# EAGLE board SparkFun_ZED-F9R_Phat_v11-Panel (EAGLE 9.6.2), part 1 of 3
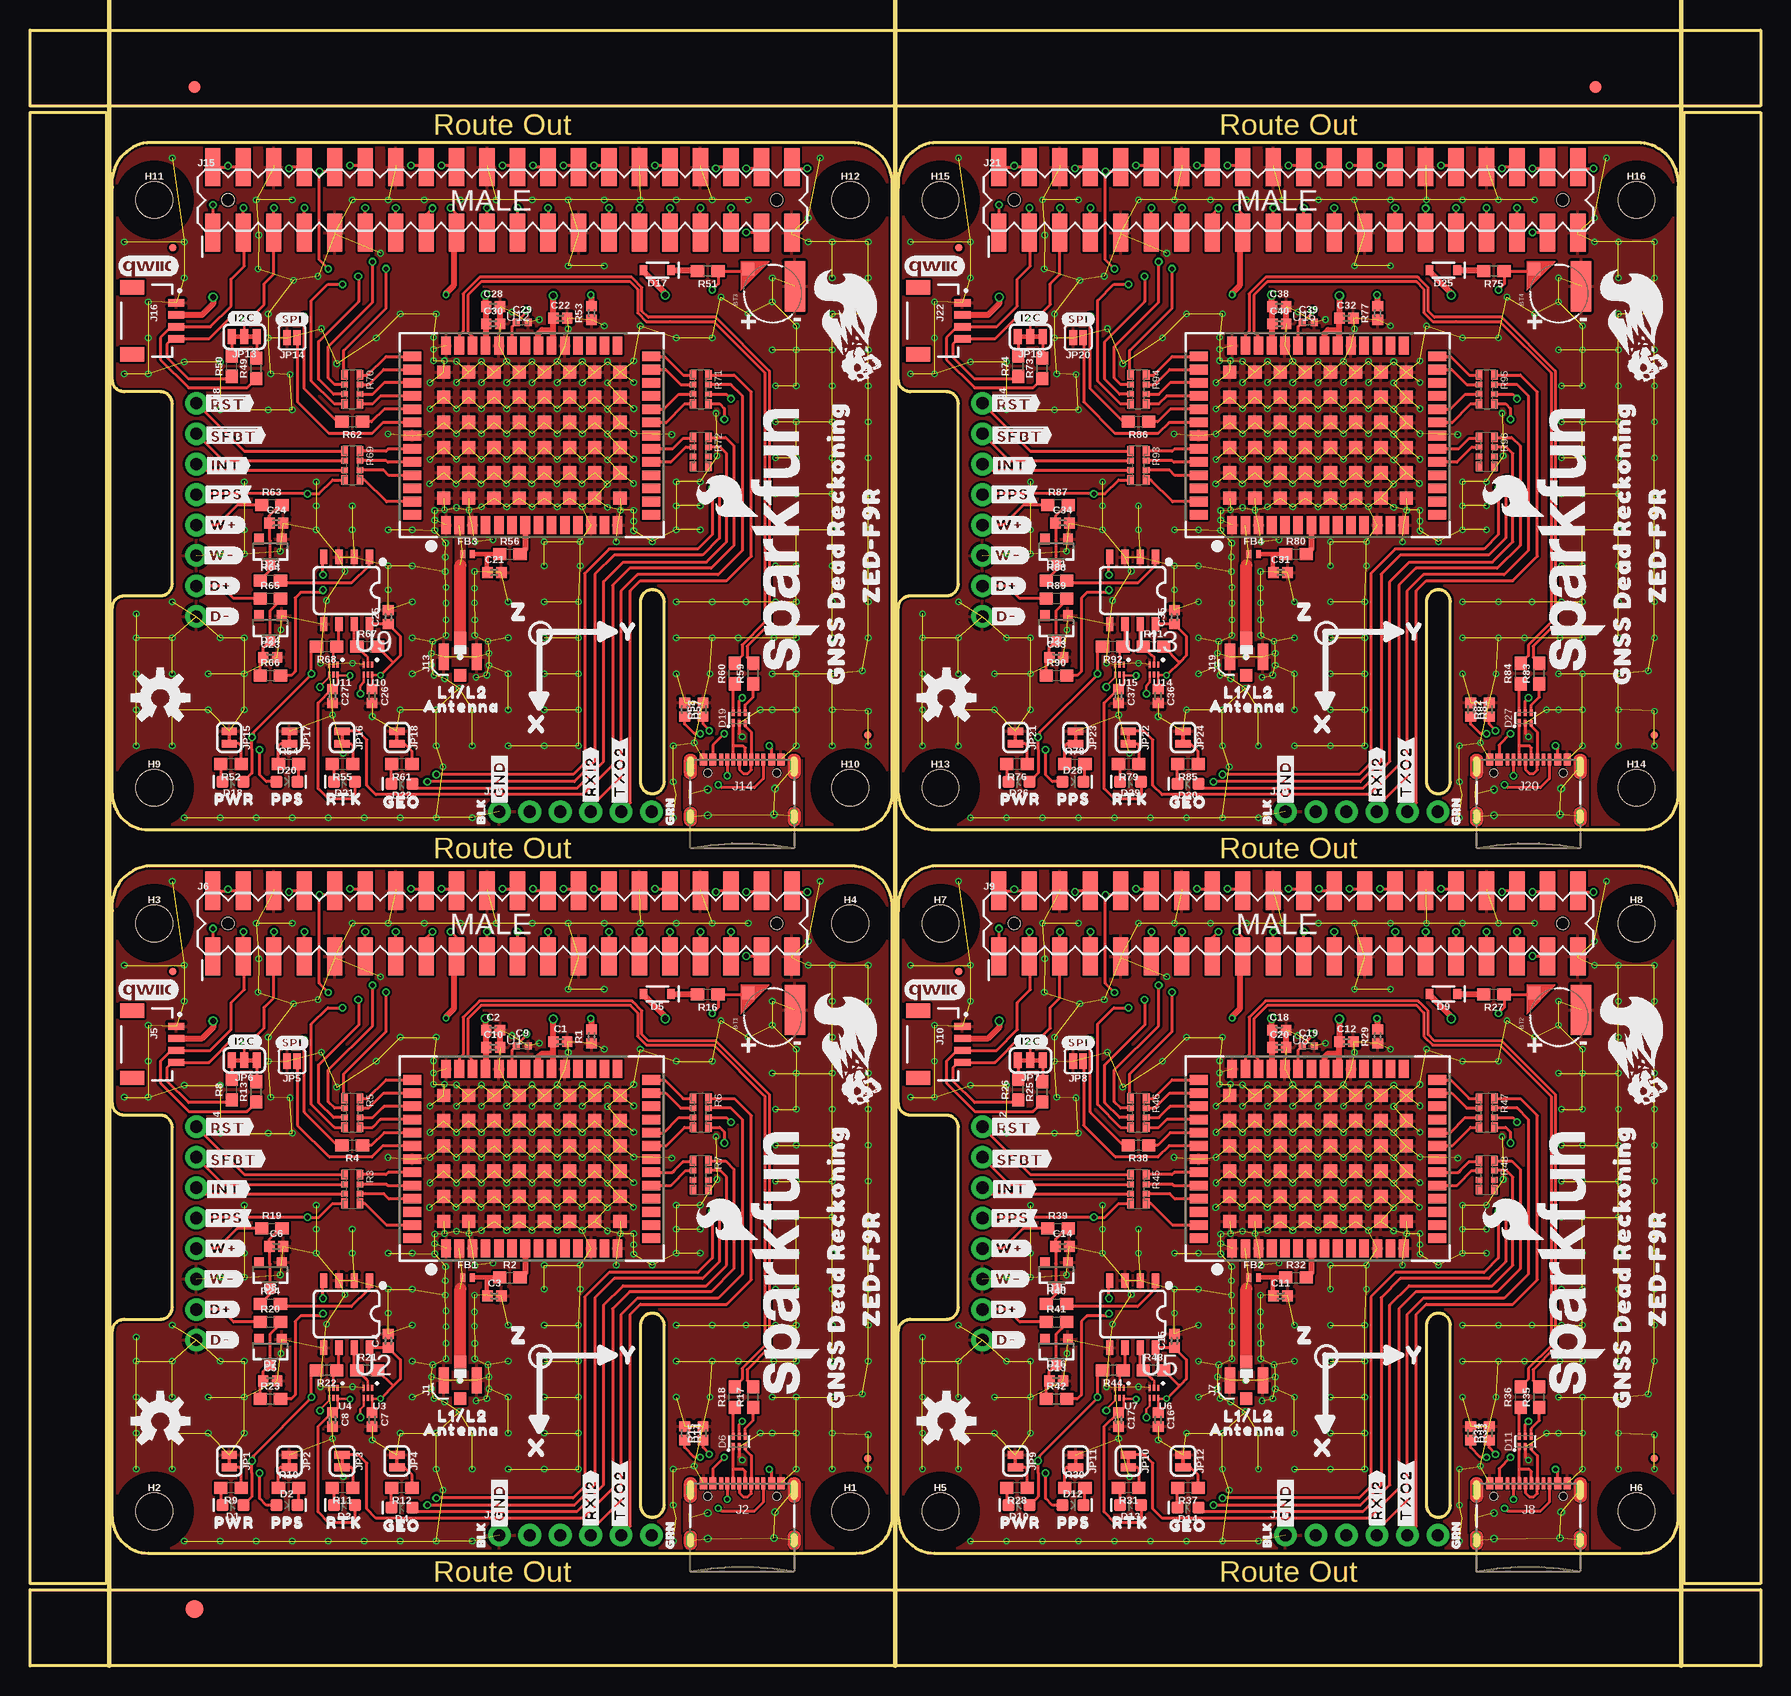
[diagram p0: board, top side]
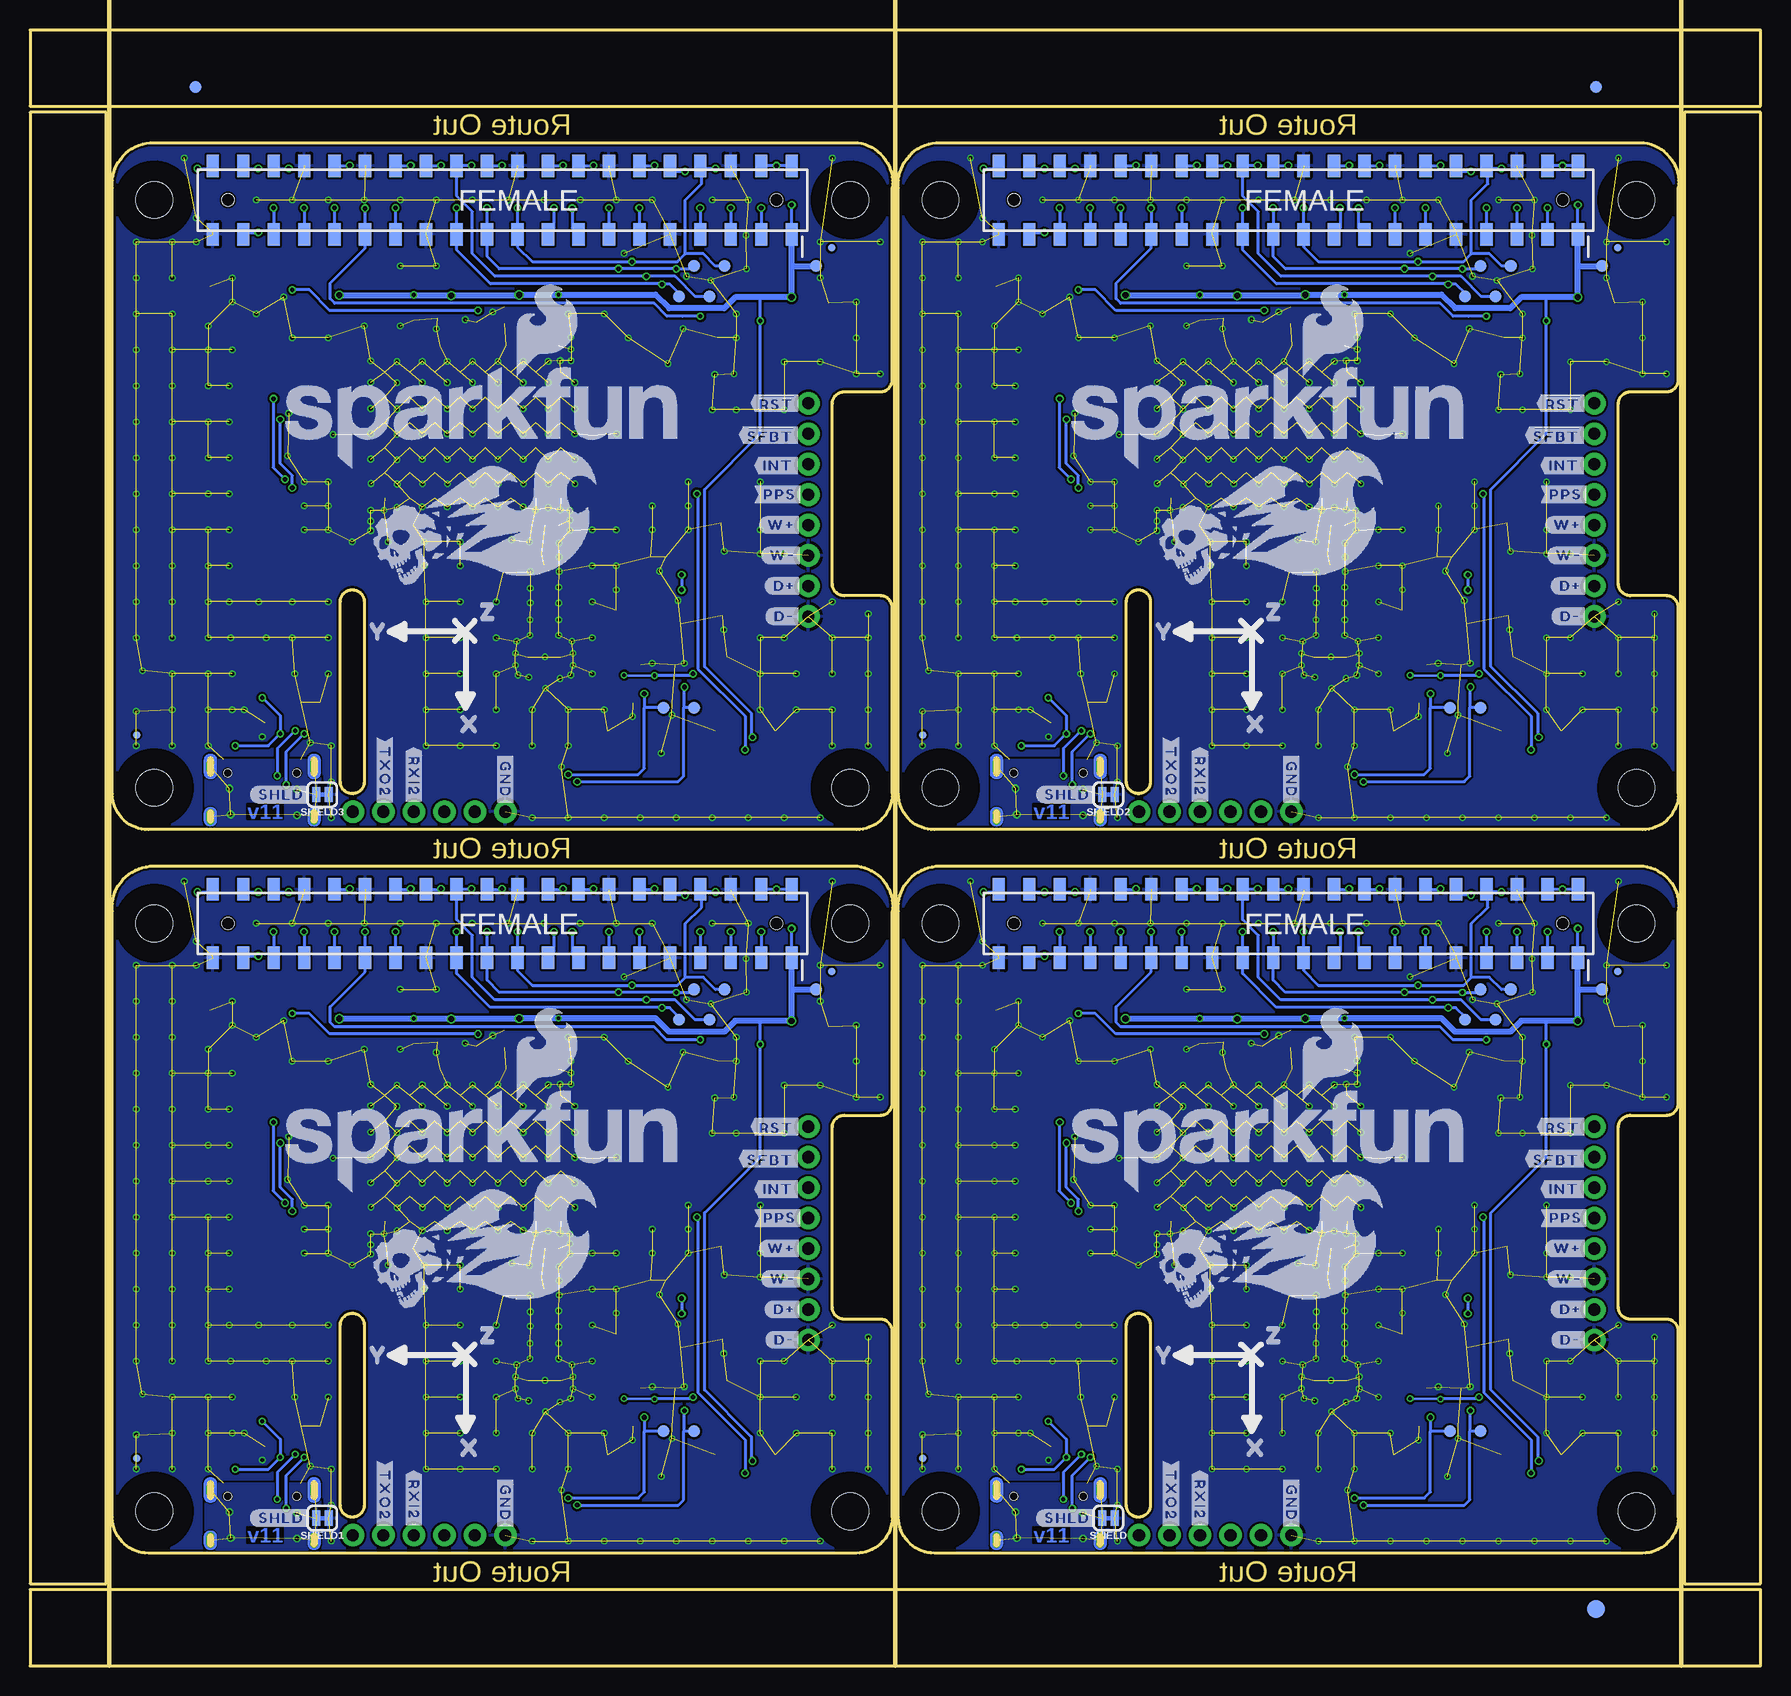
[diagram p1: board, bottom side, seen from below]

Size 144.22 x 136.37 mm. Coordinates in mm from the lower left corner, seen from the top.
Outline: 9.86,9.4 68.86,9.4 arc90 71.86,12.4 71.86,62.9 arc90 68.73,66.66 9.73,66.66 arc90 6.86,62.9 6.86,46.9 arc90 7.86,45.9 10.86,45.9 arc-90 11.86,44.9 11.86,29.9 arc-90 10.86,28.9 7.86,28.9 arc90 6.86,27.9 6.86,12.4 arc90 9.86,9.4
Outline: 51.86,12.4 arc90 52.86,13.4 52.86,28.4 arc90 51.86,29.4 arc90 50.86,28.4 50.86,13.4 arc90 51.86,12.4
Outline: 75.37,9.4 134.37,9.4 arc90 137.37,12.4 137.37,62.9 arc90 134.24,66.66 75.24,66.66 arc90 72.37,62.9 72.37,46.9 arc90 73.37,45.9 76.37,45.9 arc-90 77.37,44.9 77.37,29.9 arc-90 76.37,28.9 73.37,28.9 arc90 72.37,27.9 72.37,12.4 arc90 75.37,9.4
Outline: 117.37,12.4 arc90 118.37,13.4 118.37,28.4 arc90 117.37,29.4 arc90 116.37,28.4 116.37,13.4 arc90 117.37,12.4
Outline: 9.86,69.71 68.86,69.71 arc90 71.86,72.71 71.86,123.21 arc90 68.73,126.97 9.73,126.97 arc90 6.86,123.21 6.86,107.21 arc90 7.86,106.21 10.86,106.21 arc-90 11.86,105.21 11.86,90.21 arc-90 10.86,89.21 7.86,89.21 arc90 6.86,88.21 6.86,72.71 arc90 9.86,69.71
Outline: 51.86,72.71 arc90 52.86,73.71 52.86,88.71 arc90 51.86,89.71 arc90 50.86,88.71 50.86,73.71 arc90 51.86,72.71
Outline: 75.37,69.71 134.37,69.71 arc90 137.37,72.71 137.37,123.21 arc90 134.24,126.97 75.24,126.97 arc90 72.37,123.21 72.37,107.21 arc90 73.37,106.21 76.37,106.21 arc-90 77.37,105.21 77.37,90.21 arc-90 76.37,89.21 73.37,89.21 arc90 72.37,88.21 72.37,72.71 arc90 75.37,69.71
Outline: 117.37,72.71 arc90 118.37,73.71 118.37,88.71 arc90 117.37,89.71 arc90 116.37,88.71 116.37,73.71 arc90 117.37,72.71
Outline: 0,6.35 144.22,6.35 144.22,0 0,0 0,6.35
Outline: 137.87,129.51 144.22,129.51 144.22,6.86 137.87,6.86 137.87,129.51
Outline: 0,136.37 144.22,136.37 144.22,130.02 0,130.02 0,136.37
Outline: 0,129.51 6.35,129.51 6.35,6.86 0,6.86 0,129.51
Copper layers (1*16): Top 0.035mm / dielectric 1.5mm / Bottom 0.035mm
Design rules "SparkFun_ZED-F9R_Phat_v11": minimum track width 4mil, minimum drill 6mil, track to track 4mil, track to pad 4mil, pad to pad 4mil, via to via 4mil, smd to smd 4mil, copper to edge 4mil, drill to drill 4mil, minimum pad ring 5mil, minimum via ring 5mil, stop-mask expansion 4mil, vias tented up to drill 25mil, thermal gap 10mil
Net classes: 1 Antenna: width 1 mm, clearance 0.3 mm
tRestrict: area 65.3,9.8 to 71.5,16; area 7.3,9.8 to 13.5,16; area 7.3,58.8 to 13.5,65; area 65.3,58.8 to 71.5,65; area 130.8,9.8 to 137,16; area 72.8,9.8 to 79,16; area 72.8,58.8 to 79,65; area 130.8,58.8 to 137,65; area 65.3,70.1 to 71.5,76.3; area 7.3,70.1 to 13.5,76.3; area 7.3,119.1 to 13.5,125.3; area 65.3,119.1 to 71.5,125.3; area 130.8,70.1 to 137,76.3; area 72.8,70.1 to 79,76.3; area 72.8,119.1 to 79,125.3; area 130.8,119.1 to 137,125.3
bRestrict: area 7.3,9.8 to 13.5,16; area 7.3,58.8 to 13.5,65; area 65.3,9.8 to 71.5,16; area 65.3,58.8 to 71.5,65; area 72.8,9.8 to 79,16; area 72.8,58.8 to 79,65; area 130.8,9.8 to 137,16; area 130.8,58.8 to 137,65; area 7.3,70.1 to 13.5,76.3; area 7.3,119.1 to 13.5,125.3; area 65.3,70.1 to 71.5,76.3; area 65.3,119.1 to 71.5,125.3; area 72.8,70.1 to 79,76.3; area 72.8,119.1 to 79,125.3; area 130.8,70.1 to 137,76.3; area 130.8,119.1 to 137,125.3
Milling: 3 lines

## Footprints (pad centres in the part's own frame; a part is rotated, then mirrored left to right if it is on the bottom)
MS421R_IV03E = smd 1 x 1: + 2.022,2.032 | smd 4.2 x 1.7: - 0.6,-1.85
0402 = smd 0.85 x 0.9: 1 -0.58,0; 2 0.58,0
0402-TIGHT = smd 0.6 x 0.6: 1 -0.5,0; 2 0.5,0
LED-0603 = smd 1 x 1: A -0.877,0; C 0.877,0
SOD-323 = smd 0.63 x 0.83: A 1.15,0; C -1.15,0
SOT886 = smd 0.61 x 0.25: 1 -0.405,0.5 | smd 0.56 x 0.25: 2 -0.43,0; 3 -0.43,-0.5; 4 0.43,-0.5; 5 0.43,0; 6 0.43,0.5
SOT23-3 = smd 0.8 x 0.9: 1 -0.95,-1; 2 0.95,-1; 3 0,1.1
FIDUCIAL-1X2 = smd 1 x 1: 1 0,0
FIDUCIAL-1.5X3 = smd 1.5 x 1.5: 1 0,0
0402_MURATA = smd 0.4 x 0.7: P1 -0.4,0; P2 0.4,0
FIDUCIAL-MICRO = smd 0.635 x 0.635: 1 0,0
STAND-OFF-TIGHT = hole 3.048: 0,0
U.FL = smd 2.2 x 0.85: 1 0,1.375; 2 0,-1.375 | smd 1.05 x 1: FEED 1.525,0; NC -1.525,0
USB-C-16P-2LAYER-PADS = smd 0.3 x 1: A5 -1.25,-0.34; A6 -0.25,-0.34; A7 0.25,-0.34; A8 1.25,-0.34; B5 1.75,-0.34; B6 0.75,-0.34; B7 -0.75,-0.34; B8 -1.75,-0.34 | smd 0.6 x 1: GND -3.225,-0.34; GND2 3.225,-0.34; VBUS1 -2.45,-0.34; VBUS2 2.45,-0.34 | drill 0.4 pad 0.6 long: SHLD1 -4.318,-0.915; SHLD2 4.318,-0.915; SHLD3 -4.318,-5.095; SHLD4 4.318,-5.095 | hole 0.65: -2.89,-1.445; 2.89,-1.445
1X06_NO_SILK = drill 1.016 pad 1.88: 1 0,0; 2 2.54,0; 3 5.08,0; 4 7.62,0; 5 10.16,0; 6 12.7,0
1X08_NO_SILK = drill 1.016 pad 1.88: 1 0,0; 2 2.54,0; 3 5.08,0; 4 7.62,0; 5 10.16,0; 6 12.7,0; 7 15.24,0; 8 17.78,0
JST04_1MM_RA = smd 0.6 x 1.35: 1 -1.5,0; 2 -0.5,0; 3 0.5,0; 4 1.5,0 | smd 1.2 x 2: NC1 2.8,-3.675; NC2 -2.8,-3.675
RASPBERRY_PI_HAT_40_PIN_SMD_STACKABLE_NOHOLES_NOREF = smd 1.27 x 3.175: 1 0,-1.46; 2 0,4; 3 2.54,-1.46; 4 2.54,4; 5 5.08,-1.46; 6 5.08,4; 7 7.62,-1.46; 8 7.62,4; 9 10.16,-1.46; 10 10.16,4; 11 12.7,-1.46; 12 12.7,4; 13 15.24,-1.46; 14 15.24,4; 15 17.78,-1.46; 16 17.78,4; 17 20.32,-1.46; 18 20.32,4; 19 22.86,-1.46; 20 22.86,4; 21 25.4,-1.46; 22 25.4,4; 23 27.94,-1.46; 24 27.94,4; 25 30.48,-1.46; 26 30.48,4; 27 33.02,-1.46; 28 33.02,4; 29 35.56,-1.46; 30 35.56,4; 31 38.1,-1.46; 32 38.1,4; 33 40.64,-1.46; 34 40.64,4; 35 43.18,-1.46; 36 43.18,4; 37 45.72,-1.46; 38 45.72,4; 39 48.26,-1.46; 40 48.26,4 | smd 1.02 x 1.87 bottom: 1B 0,-1.587; 2B 0,4.128; 3B 2.54,-1.587; 4B 2.54,4.128; 5B 5.08,-1.587; 6B 5.08,4.128; 7B 7.62,-1.587; 8B 7.62,4.128; 9B 10.16,-1.587; 10B 10.16,4.128; 11B 12.7,-1.587; 12B 12.7,4.128; 13B 15.24,-1.587; 14B 15.24,4.128; 15B 17.78,-1.587; 16B 17.78,4.128; 17B 20.32,-1.587; 18B 20.32,4.128; 19B 22.86,-1.587; 20B 22.86,4.128; 21B 25.4,-1.587; 22B 25.4,4.128; 23B 27.94,-1.587; 24B 27.94,4.128; 25B 30.48,-1.587; 26B 30.48,4.128; 27B 33.02,-1.587; 28B 33.02,4.128; 29B 35.56,-1.587; 30B 35.56,4.128; 31B 38.1,-1.587; 32B 38.1,4.128; 33B 40.64,-1.587; 34B 40.64,4.128; 35B 43.18,-1.587; 36B 43.18,4.128; 37B 45.72,-1.587; 38B 45.72,4.128; 39B 48.26,-1.587; 40B 48.26,4.128 | hole 1: 1.27,1.27; 46.99,1.27
SMT-JUMPER_2_NC_TRACE_SILK = smd 0.66 x 1.27: 1 -0.521,0; 2 0.521,0
SMT-JUMPER_2_NO_SILK = smd 0.635 x 1.27: 1 -0.406,0; 2 0.406,0
SMT-JUMPER_3_2-NC_TRACE_SILK = smd 0.66 x 1.27: 1 -1.041,0; 2 0,0; 3 1.041,0
0603 = smd 1.1 x 1: 1 -0.85,0; 2 0.85,0
1206_RA = smd 0.8 x 0.55: P1 -1.2,-0.62; P4 1.2,-0.62; P5 1.2,0.68; P8 -1.2,0.68 | smd 0.5 x 0.55: P2 -0.4,-0.62; P3 0.4,-0.62; P6 0.4,0.68; P7 -0.4,0.68
PAD.03X.04 = smd 1.016 x 1.016: P$1 0,0
UBLOX_ZED_F9R = smd 1.1 x 1.1: G1 -7.312,-5.37; G2 -5.212,-5.37; G3 -3.112,-5.37; G4 -1.012,-5.37; G5 1.088,-5.37; G6 3.188,-5.37; G7 5.288,-5.37; G8 7.388,-5.37; G9 7.388,-3.27; G10 5.288,-3.27; G11 3.188,-3.27; G12 1.088,-3.27; G13 -1.012,-3.27; G14 -3.112,-3.27; G15 -5.212,-3.27; G16 -7.312,-3.27; G17 -7.312,-1.17; G18 -5.212,-1.17; G19 -3.112,-1.17; G20 -1.012,-1.17; G21 1.088,-1.17; G22 3.188,-1.17; G23 5.288,-1.17; G24 7.388,-1.17; G25 7.388,0.93; G26 5.288,0.93; G27 3.188,0.93; G28 1.088,0.93; G29 -1.012,0.93; G30 -3.112,0.93; G31 -5.212,0.93; G32 -7.312,0.93; G33 -7.312,3.03; G34 -5.212,3.03; G35 -3.112,3.03; G36 -1.012,3.03; G37 1.088,3.03; G38 3.188,3.03; G39 5.288,3.03; G40 7.388,3.03; G41 7.388,5.13; G42 5.288,5.13; G43 3.188,5.13; G44 1.088,5.13; G45 -1.012,5.13; G46 -3.112,5.13; G47 -5.212,5.13; G48 -7.312,5.13 | smd 0.8 x 1.5: P1 -7.112,-7.62; P2 -6.012,-7.62; P3 -4.912,-7.62; P4 -3.812,-7.62; P5 -2.712,-7.62; P6 -1.612,-7.62; P7 -0.512,-7.62; P8 0.588,-7.62; P9 1.688,-7.62; P10 2.788,-7.62; P11 3.888,-7.62; P12 4.988,-7.62; P13 6.088,-7.62; P14 7.188,-7.62; P28 7.188,7.33; P29 6.088,7.33; P30 4.988,7.33; P31 3.888,7.33; P32 2.788,7.33; P33 1.688,7.33; P34 0.588,7.33; P35 -0.512,7.33; P36 -1.612,7.33; P37 -2.712,7.33; P38 -3.812,7.33; P39 -4.912,7.33; P40 -6.012,7.33; P41 -7.112,7.33 | smd 1.5 x 0.8: P15 9.988,-6.77; P16 9.988,-5.67; P17 9.988,-4.57; P18 9.988,-3.47; P19 9.988,-2.37; P20 9.988,-1.27; P21 9.988,-0.17; P22 9.988,0.93; P23 9.988,2.03; P24 9.988,3.13; P25 9.988,4.23; P26 9.988,5.33; P27 9.988,6.43; P42 -9.912,6.43; P43 -9.912,5.33; P44 -9.912,4.23; P45 -9.912,3.13; P46 -9.912,2.03; P47 -9.912,0.93; P48 -9.912,-0.17; P49 -9.912,-1.27; P50 -9.912,-2.37; P51 -9.912,-3.47; P52 -9.912,-4.57; P53 -9.912,-5.67; P54 -9.912,-6.77
SO08 = smd 0.6 x 1.2: 1 -1.905,-2.8; 2 -0.635,-2.8; 3 0.635,-2.8; 4 1.905,-2.8; 5 1.905,2.8; 6 0.635,2.8; 7 -0.635,2.8; 8 -1.905,2.8
SIP6_MICROPAK2 = smd 0.19 x 0.5: P1 -0.36,-0.4; P2 -0.01,-0.4; P3 0.34,-0.4; P4 0.34,0.43; P5 -0.01,0.43; P6 -0.36,0.43

## Placement (x,y rotation side)
BT1  RELOWABLE_BATTERY_MS421R  [MS421R_IV03E]  61.89,54.08 90 top
BT2  RELOWABLE_BATTERY_MS421R  [MS421R_IV03E]  127.4,54.08 90 top
BT3  RELOWABLE_BATTERY_MS421R  [MS421R_IV03E]  61.89,114.39 90 top
BT4  RELOWABLE_BATTERY_MS421R  [MS421R_IV03E]  127.4,114.39 90 top
C1  1.0uF  [0402]  44.2,52.03 0 top
C2  1.0uF  [0402]  38.59,53 0 top
C3  47pF  [0402]  38.7,30.84 0 top
C4  0.1uF  [0402]  29.86,27.11 90 top
C5  1nF  [0402]  20.03,23.77 0 top
C6  1nF  [0402]  20.53,34.97 0 top
C7  0.1uF  [0402]  28.5,20.53 270 top
C8  0.1uF  [0402]  25.2,20.53 270 top
C9  2.2uF  [0402-TIGHT]  41.02,51.69 0 top
C10  1.0uF  [0402]  38.61,51.56 0 top
C11  47pF  [0402]  104.21,30.84 0 top
C12  1.0uF  [0402]  109.71,52.03 0 top
C13  1nF  [0402]  85.53,23.77 0 top
C14  1nF  [0402]  86.04,34.97 0 top
C15  0.1uF  [0402]  95.37,27.11 90 top
C16  0.1uF  [0402]  94.01,20.53 270 top
C17  0.1uF  [0402]  90.71,20.53 270 top
C18  1.0uF  [0402]  104.1,53 0 top
C19  2.2uF  [0402-TIGHT]  106.53,51.69 0 top
C20  1.0uF  [0402]  104.12,51.56 0 top
C21  47pF  [0402]  38.7,91.15 0 top
C22  1.0uF  [0402]  44.2,112.34 0 top
C23  1nF  [0402]  20.03,84.08 0 top
C24  1nF  [0402]  20.53,95.28 0 top
C25  0.1uF  [0402]  29.86,87.42 90 top
C26  0.1uF  [0402]  28.5,80.84 270 top
C27  0.1uF  [0402]  25.2,80.84 270 top
C28  1.0uF  [0402]  38.59,113.31 0 top
C29  2.2uF  [0402-TIGHT]  41.02,112 0 top
C30  1.0uF  [0402]  38.61,111.87 0 top
C31  47pF  [0402]  104.21,91.15 0 top
C32  1.0uF  [0402]  109.71,112.34 0 top
C33  1nF  [0402]  85.53,84.08 0 top
C34  1nF  [0402]  86.04,95.28 0 top
C35  0.1uF  [0402]  95.37,87.42 90 top
C36  0.1uF  [0402]  94.01,80.84 270 top
C37  0.1uF  [0402]  90.71,80.84 270 top
C38  1.0uF  [0402]  104.1,113.31 0 top
C39  2.2uF  [0402-TIGHT]  106.53,112 0 top
C40  1.0uF  [0402]  104.12,111.87 0 top
D1  RED  [LED-0603]  16.9,13.4 180 top
D2  BLUE  [LED-0603]  21.4,13.4 0 top
D3  BLUE  [LED-0603]  26.2,13.4 180 top
D4  BLUE  [LED-0603]  30.99,13.21 180 top
D5  0.5A/40V/420mV  [SOD-323]  52.28,56.03 180 top
D6  PRTR5V0U2F  [SOT886]  59.1,18.7 90 top
D7  15V  [SOT23-3]  20.03,26.24 180 top
D8  15V  [SOT23-3]  20.03,32.62 180 top
D9  0.5A/40V/420mV  [SOD-323]  117.79,56.03 180 top
D10  RED  [LED-0603]  82.41,13.4 180 top
D11  PRTR5V0U2F  [SOT886]  124.61,18.7 90 top
D12  BLUE  [LED-0603]  86.91,13.4 0 top
D13  BLUE  [LED-0603]  91.71,13.4 180 top
D14  BLUE  [LED-0603]  96.5,13.21 180 top
D15  15V  [SOT23-3]  85.53,32.62 180 top
D16  15V  [SOT23-3]  85.53,26.24 180 top
D17  0.5A/40V/420mV  [SOD-323]  52.28,116.34 180 top
D18  RED  [LED-0603]  16.9,73.71 180 top
D19  PRTR5V0U2F  [SOT886]  59.1,79.01 90 top
D20  BLUE  [LED-0603]  21.4,73.71 0 top
D21  BLUE  [LED-0603]  26.2,73.71 180 top
D22  BLUE  [LED-0603]  30.99,73.52 180 top
D23  15V  [SOT23-3]  20.03,92.93 180 top
D24  15V  [SOT23-3]  20.03,86.55 180 top
D25  0.5A/40V/420mV  [SOD-323]  117.79,116.34 180 top
D26  RED  [LED-0603]  82.41,73.71 180 top
D27  PRTR5V0U2F  [SOT886]  124.61,79.01 90 top
D28  BLUE  [LED-0603]  86.91,73.71 0 top
D29  BLUE  [LED-0603]  91.71,73.71 180 top
D30  BLUE  [LED-0603]  96.5,73.52 180 top
D31  15V  [SOT23-3]  85.53,92.93 180 top
D32  15V  [SOT23-3]  85.53,86.55 180 top
E$1  [FIDUCIAL-1X2]  13.72,131.61 0 top
E$2  [FIDUCIAL-1X2]  13.72,131.61 0 bottom
E$3  [FIDUCIAL-1X2]  130.44,131.61 0 top
E$4  [FIDUCIAL-1X2]  130.44,131.61 0 bottom
E$5  [FIDUCIAL-1.5X3]  13.72,4.76 0 top
E$6  [FIDUCIAL-1.5X3]  13.72,4.76 0 bottom
FB1  120NH  [0402_MURATA]  36.46,32.37 0 top
FB2  120NH  [0402_MURATA]  101.97,32.37 0 top
FB3  120NH  [0402_MURATA]  36.46,92.68 0 top
FB4  120NH  [0402_MURATA]  101.97,92.68 0 top
FD1  FIDUCIALUFIDUCIAL  [FIDUCIAL-MICRO]  69.83,17.3 90 top
FD2  FIDUCIALUFIDUCIAL  [FIDUCIAL-MICRO]  69.83,17.3 270 bottom
FD3  FIDUCIALUFIDUCIAL  [FIDUCIAL-MICRO]  11.91,57.91 0 top
FD4  FIDUCIALUFIDUCIAL  [FIDUCIAL-MICRO]  11.91,57.91 0 bottom
FD5  FIDUCIALUFIDUCIAL  [FIDUCIAL-MICRO]  135.34,17.3 90 top
FD6  FIDUCIALUFIDUCIAL  [FIDUCIAL-MICRO]  135.34,17.3 270 bottom
FD7  FIDUCIALUFIDUCIAL  [FIDUCIAL-MICRO]  77.42,57.91 0 top
FD8  FIDUCIALUFIDUCIAL  [FIDUCIAL-MICRO]  77.42,57.91 0 bottom
FD9  FIDUCIALUFIDUCIAL  [FIDUCIAL-MICRO]  69.83,77.61 90 top
FD10  FIDUCIALUFIDUCIAL  [FIDUCIAL-MICRO]  69.83,77.61 270 bottom
FD11  FIDUCIALUFIDUCIAL  [FIDUCIAL-MICRO]  11.91,118.22 0 top
FD12  FIDUCIALUFIDUCIAL  [FIDUCIAL-MICRO]  11.91,118.22 0 bottom
FD13  FIDUCIALUFIDUCIAL  [FIDUCIAL-MICRO]  135.34,77.61 90 top
FD14  FIDUCIALUFIDUCIAL  [FIDUCIAL-MICRO]  135.34,77.61 270 bottom
FD15  FIDUCIALUFIDUCIAL  [FIDUCIAL-MICRO]  77.42,118.22 0 top
FD16  FIDUCIALUFIDUCIAL  [FIDUCIAL-MICRO]  77.42,118.22 0 bottom
H1  STAND-OFFTIGHT  [STAND-OFF-TIGHT]  68.36,12.9 0 top
H2  STAND-OFFTIGHT  [STAND-OFF-TIGHT]  10.36,12.9 0 top
H3  STAND-OFFTIGHT  [STAND-OFF-TIGHT]  10.36,61.9 0 top
H4  STAND-OFFTIGHT  [STAND-OFF-TIGHT]  68.36,61.9 0 top
H5  STAND-OFFTIGHT  [STAND-OFF-TIGHT]  75.87,12.9 0 top
H6  STAND-OFFTIGHT  [STAND-OFF-TIGHT]  133.87,12.9 0 top
H7  STAND-OFFTIGHT  [STAND-OFF-TIGHT]  75.87,61.9 0 top
H8  STAND-OFFTIGHT  [STAND-OFF-TIGHT]  133.87,61.9 0 top
H9  STAND-OFFTIGHT  [STAND-OFF-TIGHT]  10.36,73.21 0 top
H10  STAND-OFFTIGHT  [STAND-OFF-TIGHT]  68.36,73.21 0 top
H11  STAND-OFFTIGHT  [STAND-OFF-TIGHT]  10.36,122.21 0 top
H12  STAND-OFFTIGHT  [STAND-OFF-TIGHT]  68.36,122.21 0 top
H13  STAND-OFFTIGHT  [STAND-OFF-TIGHT]  75.87,73.21 0 top
H14  STAND-OFFTIGHT  [STAND-OFF-TIGHT]  133.87,73.21 0 top
H15  STAND-OFFTIGHT  [STAND-OFF-TIGHT]  75.87,122.21 0 top
H16  STAND-OFFTIGHT  [STAND-OFF-TIGHT]  133.87,122.21 0 top
J1  U.FL  [U.FL]  35.86,23.8 90 top
J2  [USB-C-16P-2LAYER-PADS]  59.36,15.58 0 top
J3  [1X06_NO_SILK]  39.11,10.9 0 top
J4  [1X08_NO_SILK]  13.86,44.95 270 top
J5  QWIIC_RIGHT_ANGLE  [JST04_1MM_RA]  12.19,51.82 270 top
J6  RASPBERRYPI-40-PIN-GPIO_SMD_STACK_NOHOLES_NOREF  [RASPBERRY_PI_HAT_40_PIN_SMD_STACKABLE_NOHOLES_NOREF]  15.23,60.61 0 top
J7  U.FL  [U.FL]  101.37,23.8 90 top
J8  [USB-C-16P-2LAYER-PADS]  124.87,15.58 0 top
J9  RASPBERRYPI-40-PIN-GPIO_SMD_STACK_NOHOLES_NOREF  [RASPBERRY_PI_HAT_40_PIN_SMD_STACKABLE_NOHOLES_NOREF]  80.74,60.61 0 top
J10  QWIIC_RIGHT_ANGLE  [JST04_1MM_RA]  77.7,51.82 270 top
J11  [1X06_NO_SILK]  104.62,10.9 0 top
J12  [1X08_NO_SILK]  79.37,44.95 270 top
J13  U.FL  [U.FL]  35.86,84.11 90 top
J14  [USB-C-16P-2LAYER-PADS]  59.36,75.89 0 top
J15  RASPBERRYPI-40-PIN-GPIO_SMD_STACK_NOHOLES_NOREF  [RASPBERRY_PI_HAT_40_PIN_SMD_STACKABLE_NOHOLES_NOREF]  15.23,120.92 0 top
J16  QWIIC_RIGHT_ANGLE  [JST04_1MM_RA]  12.19,112.13 270 top
J17  [1X06_NO_SILK]  39.11,71.21 0 top
J18  [1X08_NO_SILK]  13.86,105.26 270 top
J19  U.FL  [U.FL]  101.37,84.11 90 top
J20  [USB-C-16P-2LAYER-PADS]  124.87,75.89 0 top
J21  RASPBERRYPI-40-PIN-GPIO_SMD_STACK_NOHOLES_NOREF  [RASPBERRY_PI_HAT_40_PIN_SMD_STACKABLE_NOHOLES_NOREF]  80.74,120.92 0 top
J22  QWIIC_RIGHT_ANGLE  [JST04_1MM_RA]  77.7,112.13 270 top
J23  [1X06_NO_SILK]  104.62,71.21 0 top
J24  [1X08_NO_SILK]  79.37,105.26 270 top
JP1  JUMPER-SMT_2_NC_TRACE_SILK  [SMT-JUMPER_2_NC_TRACE_SILK]  16.61,17.08 270 top
JP2  JUMPER-SMT_2_NC_TRACE_SILK  [SMT-JUMPER_2_NC_TRACE_SILK]  21.62,17.08 270 top
JP3  JUMPER-SMT_2_NC_TRACE_SILK  [SMT-JUMPER_2_NC_TRACE_SILK]  26,17.08 270 top
JP4  JUMPER-SMT_2_NC_TRACE_SILK  [SMT-JUMPER_2_NC_TRACE_SILK]  30.58,17.08 270 top
JP5  JUMPER-SMT_2_NO_SILK  [SMT-JUMPER_2_NO_SILK]  21.83,50.42 180 top
JP6  JUMPER-SMT_3_2-NC_TRACE_SILK  [SMT-JUMPER_3_2-NC_TRACE_SILK]  17.86,50.49 180 top
JP7  JUMPER-SMT_3_2-NC_TRACE_SILK  [SMT-JUMPER_3_2-NC_TRACE_SILK]  83.37,50.49 180 top
JP8  JUMPER-SMT_2_NO_SILK  [SMT-JUMPER_2_NO_SILK]  87.34,50.42 180 top
JP9  JUMPER-SMT_2_NC_TRACE_SILK  [SMT-JUMPER_2_NC_TRACE_SILK]  82.12,17.08 270 top
JP10  JUMPER-SMT_2_NC_TRACE_SILK  [SMT-JUMPER_2_NC_TRACE_SILK]  91.51,17.08 270 top
JP11  JUMPER-SMT_2_NC_TRACE_SILK  [SMT-JUMPER_2_NC_TRACE_SILK]  87.13,17.08 270 top
JP12  JUMPER-SMT_2_NC_TRACE_SILK  [SMT-JUMPER_2_NC_TRACE_SILK]  96.09,17.08 270 top
JP13  JUMPER-SMT_3_2-NC_TRACE_SILK  [SMT-JUMPER_3_2-NC_TRACE_SILK]  17.86,110.8 180 top
JP14  JUMPER-SMT_2_NO_SILK  [SMT-JUMPER_2_NO_SILK]  21.83,110.73 180 top
JP15  JUMPER-SMT_2_NC_TRACE_SILK  [SMT-JUMPER_2_NC_TRACE_SILK]  16.61,77.39 270 top
JP16  JUMPER-SMT_2_NC_TRACE_SILK  [SMT-JUMPER_2_NC_TRACE_SILK]  26,77.39 270 top
JP17  JUMPER-SMT_2_NC_TRACE_SILK  [SMT-JUMPER_2_NC_TRACE_SILK]  21.62,77.39 270 top
JP18  JUMPER-SMT_2_NC_TRACE_SILK  [SMT-JUMPER_2_NC_TRACE_SILK]  30.58,77.39 270 top
JP19  JUMPER-SMT_3_2-NC_TRACE_SILK  [SMT-JUMPER_3_2-NC_TRACE_SILK]  83.37,110.8 180 top
JP20  JUMPER-SMT_2_NO_SILK  [SMT-JUMPER_2_NO_SILK]  87.34,110.73 180 top
JP21  JUMPER-SMT_2_NC_TRACE_SILK  [SMT-JUMPER_2_NC_TRACE_SILK]  82.12,77.39 270 top
JP22  JUMPER-SMT_2_NC_TRACE_SILK  [SMT-JUMPER_2_NC_TRACE_SILK]  91.51,77.39 270 top
JP23  JUMPER-SMT_2_NC_TRACE_SILK  [SMT-JUMPER_2_NC_TRACE_SILK]  87.13,77.39 270 top
JP24  JUMPER-SMT_2_NC_TRACE_SILK  [SMT-JUMPER_2_NC_TRACE_SILK]  96.09,77.39 270 top
LOGO1  QWIIC_LOGO_5MM  [QWIIC_5MM]  9.86,56.4 0 top
LOGO2  OSHW-LOGOM  [OSHW-LOGO-M]  10.86,20.4 0 top
LOGO3  SFE_LOGO_NAME_FLAME.2_INCH  [SFE_LOGO_NAME_FLAME_.2]  62.9,33.66 90 top
LOGO4  SFE_LOGO_NAME_FLAME.2_INCH  [SFE_LOGO_NAME_FLAME_.2]  128.41,33.66 90 top
LOGO5  OSHW-LOGOM  [OSHW-LOGO-M]  76.37,20.4 0 top
LOGO6  QWIIC_LOGO_5MM  [QWIIC_5MM]  75.37,56.4 0 top
LOGO7  SFE_LOGO_NAME_FLAME.2_INCH  [SFE_LOGO_NAME_FLAME_.2]  62.9,93.97 90 top
LOGO8  OSHW-LOGOM  [OSHW-LOGO-M]  10.86,80.71 0 top
LOGO9  QWIIC_LOGO_5MM  [QWIIC_5MM]  9.86,116.71 0 top
LOGO10  SFE_LOGO_NAME_FLAME.2_INCH  [SFE_LOGO_NAME_FLAME_.2]  128.41,93.97 90 top
LOGO11  OSHW-LOGOM  [OSHW-LOGO-M]  76.37,80.71 0 top
LOGO12  QWIIC_LOGO_5MM  [QWIIC_5MM]  75.37,116.71 0 top
R1  100K  [0402]  46.8,52.46 90 top
R2  33  [0603]  39.99,32.37 0 top
R3  33  [1206_RA]  26.83,39.75 270 top
R4  33  [0603]  26.86,43.4 180 top
R5  33  [1206_RA]  26.83,46.1 270 top
R6  33  [1206_RA]  55.86,46.1 270 top
R7  33  [1206_RA]  55.86,40.89 270 top
R8  2.2k  [0603]  16.82,48.03 90 top
R9  1k  [0603]  16.75,14.86 180 top
R10  2.2k  [0603]  21.56,14.86 0 top
R11  2.2k  [0603]  26.04,14.86 180 top
R12  2.2k  [0603]  30.99,14.86 180 top
R13  2.2k  [0603]  18.86,47.86 90 top
R14  5.1k  [0402]  54.55,19.4 270 top
R15  5.1k  [0402]  56.09,19.4 270 top
R16  3.3k  [0603]  56.48,55.97 180 top
R17  27  [0603]  60.27,22.41 90 top
R18  27  [0603]  58.71,22.41 90 top
R19  3.3k  [0603]  20.15,36.47 0 top
R20  3.3k  [0603]  20.03,28.68 0 top
R21  910  [0603]  28.11,24.66 0 top
R22  910  [0603]  24.72,24.66 180 top
R23  470  [0603]  20.03,22.25 0 top
R24  470  [0603]  20.03,30.18 0 top
R25  2.2k  [0603]  84.37,47.86 90 top
R26  2.2k  [0603]  82.33,48.03 90 top
R27  3.3k  [0603]  121.99,55.97 180 top
R28  1k  [0603]  82.26,14.86 180 top
R29  100K  [0402]  112.31,52.46 90 top
R30  2.2k  [0603]  87.07,14.86 0 top
R31  2.2k  [0603]  91.55,14.86 180 top
R32  33  [0603]  105.5,32.37 0 top
R33  5.1k  [0402]  120.06,19.4 270 top
R34  5.1k  [0402]  121.6,19.4 270 top
R35  27  [0603]  125.78,22.41 90 top
R36  27  [0603]  124.22,22.41 90 top
R37  2.2k  [0603]  96.5,14.86 180 top
R38  33  [0603]  92.37,43.4 180 top
R39  3.3k  [0603]  85.66,36.47 0 top
R40  470  [0603]  85.53,30.18 0 top
R41  3.3k  [0603]  85.53,28.68 0 top
R42  470  [0603]  85.53,22.25 0 top
R43  910  [0603]  93.62,24.66 0 top
R44  910  [0603]  90.23,24.66 180 top
R45  33  [1206_RA]  92.34,39.75 270 top
R46  33  [1206_RA]  92.34,46.1 270 top
R47  33  [1206_RA]  121.37,46.1 270 top
R48  33  [1206_RA]  121.37,40.89 270 top
R49  2.2k  [0603]  18.86,108.17 90 top
R50  2.2k  [0603]  16.82,108.34 90 top
R51  3.3k  [0603]  56.48,116.28 180 top
R52  1k  [0603]  16.75,75.17 180 top
R53  100K  [0402]  46.8,112.77 90 top
R54  2.2k  [0603]  21.56,75.17 0 top
R55  2.2k  [0603]  26.04,75.17 180 top
R56  33  [0603]  39.99,92.68 0 top
R57  5.1k  [0402]  54.55,79.71 270 top
R58  5.1k  [0402]  56.09,79.71 270 top
R59  27  [0603]  60.27,82.72 90 top
R60  27  [0603]  58.71,82.72 90 top
R61  2.2k  [0603]  30.99,75.17 180 top
R62  33  [0603]  26.86,103.71 180 top
R63  3.3k  [0603]  20.15,96.77 0 top
R64  470  [0603]  20.03,90.49 0 top
R65  3.3k  [0603]  20.03,88.99 0 top
R66  470  [0603]  20.03,82.56 0 top
R67  910  [0603]  28.11,84.96 0 top
R68  910  [0603]  24.72,84.96 180 top
R69  33  [1206_RA]  26.83,100.06 270 top
R70  33  [1206_RA]  26.83,106.41 270 top
R71  33  [1206_RA]  55.86,106.41 270 top
R72  33  [1206_RA]  55.86,101.2 270 top
R73  2.2k  [0603]  84.37,108.17 90 top
R74  2.2k  [0603]  82.33,108.34 90 top
R75  3.3k  [0603]  121.99,116.28 180 top
R76  1k  [0603]  82.26,75.17 180 top
R77  100K  [0402]  112.31,112.77 90 top
R78  2.2k  [0603]  87.07,75.17 0 top
R79  2.2k  [0603]  91.55,75.17 180 top
R80  33  [0603]  105.5,92.68 0 top
R81  5.1k  [0402]  120.06,79.71 270 top
R82  5.1k  [0402]  121.6,79.71 270 top
R83  27  [0603]  125.78,82.72 90 top
R84  27  [0603]  124.22,82.72 90 top
R85  2.2k  [0603]  96.5,75.17 180 top
R86  33  [0603]  92.37,103.71 180 top
R87  3.3k  [0603]  85.66,96.77 0 top
R88  470  [0603]  85.53,90.49 0 top
R89  3.3k  [0603]  85.53,88.99 0 top
R90  470  [0603]  85.53,82.56 0 top
R91  910  [0603]  93.62,84.96 0 top
R92  910  [0603]  90.23,84.96 180 top
R93  33  [1206_RA]  92.34,100.06 270 top
R94  33  [1206_RA]  92.34,106.41 270 top
R95  33  [1206_RA]  121.37,106.41 270 top
R96  33  [1206_RA]  121.37,101.2 270 top
SHIELD  JUMPER-SMT_2_NC_TRACE_SILK  [SMT-JUMPER_2_NC_TRACE_SILK]  54.36,12.32 180 bottom
SHIELD1  JUMPER-SMT_2_NC_TRACE_SILK  [SMT-JUMPER_2_NC_TRACE_SILK]  119.87,12.32 180 bottom
SHIELD2  JUMPER-SMT_2_NC_TRACE_SILK  [SMT-JUMPER_2_NC_TRACE_SILK]  54.36,72.63 180 bottom
SHIELD3  JUMPER-SMT_2_NC_TRACE_SILK  [SMT-JUMPER_2_NC_TRACE_SILK]  119.87,72.63 180 bottom
TP1  TEST-POINT3X4  [PAD.03X.04]  20.83,56.39 270 bottom
TP2  TEST-POINT3X4  [PAD.03X.04]  23.37,56.39 270 bottom
TP3  TEST-POINT3X4  [PAD.03X.04]  24.64,53.85 270 bottom
TP4  TEST-POINT3X4  [PAD.03X.04]  22.1,53.85 270 bottom
TP5  TEST-POINT3X4  [PAD.03X.04]  13.21,56.39 0 bottom
TP6  TEST-POINT3X4  [PAD.03X.04]  25.91,19.56 270 bottom
TP7  TEST-POINT3X4  [PAD.03X.04]  23.37,19.56 270 bottom
TP8  TEST-POINT3X4  [PAD.03X.04]  86.34,56.39 270 bottom
TP9  TEST-POINT3X4  [PAD.03X.04]  88.88,56.39 270 bottom
TP10  TEST-POINT3X4  [PAD.03X.04]  90.15,53.85 270 bottom
TP11  TEST-POINT3X4  [PAD.03X.04]  87.61,53.85 270 bottom
TP12  TEST-POINT3X4  [PAD.03X.04]  78.72,56.39 0 bottom
TP13  TEST-POINT3X4  [PAD.03X.04]  91.42,19.56 270 bottom
TP14  TEST-POINT3X4  [PAD.03X.04]  88.88,19.56 270 bottom
TP15  TEST-POINT3X4  [PAD.03X.04]  20.83,116.7 270 bottom
TP16  TEST-POINT3X4  [PAD.03X.04]  23.37,116.7 270 bottom
TP17  TEST-POINT3X4  [PAD.03X.04]  24.64,114.16 270 bottom
TP18  TEST-POINT3X4  [PAD.03X.04]  22.1,114.16 270 bottom
TP19  TEST-POINT3X4  [PAD.03X.04]  13.21,116.7 0 bottom
TP20  TEST-POINT3X4  [PAD.03X.04]  25.91,79.87 270 bottom
TP21  TEST-POINT3X4  [PAD.03X.04]  23.37,79.87 270 bottom
TP22  TEST-POINT3X4  [PAD.03X.04]  86.34,116.7 270 bottom
TP23  TEST-POINT3X4  [PAD.03X.04]  88.88,116.7 270 bottom
TP24  TEST-POINT3X4  [PAD.03X.04]  90.15,114.16 270 bottom
TP25  TEST-POINT3X4  [PAD.03X.04]  87.61,114.16 270 bottom
TP26  TEST-POINT3X4  [PAD.03X.04]  78.72,116.7 0 bottom
TP27  TEST-POINT3X4  [PAD.03X.04]  91.42,79.87 270 bottom
TP28  TEST-POINT3X4  [PAD.03X.04]  88.88,79.87 270 bottom
U1  U-BLOX_ZED-F9R  [UBLOX_ZED_F9R]  41.78,42.42 0 top
U2  DUAL-OPTO_HCPL-073LSOIC-8  [SO08]  26.38,29.33 180 top
U3  UHS_INVERTER_SCHMITT_TRIGGER_MPAK2  [SIP6_MICROPAK2]  28.15,22.76 180 top
U4  UHS_INVERTER_SCHMITT_TRIGGER_MPAK2  [SIP6_MICROPAK2]  25.27,22.76 180 top
U5  DUAL-OPTO_HCPL-073LSOIC-8  [SO08]  91.89,29.33 180 top
U6  UHS_INVERTER_SCHMITT_TRIGGER_MPAK2  [SIP6_MICROPAK2]  93.66,22.76 180 top
U7  UHS_INVERTER_SCHMITT_TRIGGER_MPAK2  [SIP6_MICROPAK2]  90.78,22.76 180 top
U8  U-BLOX_ZED-F9R  [UBLOX_ZED_F9R]  107.29,42.42 0 top
U9  DUAL-OPTO_HCPL-073LSOIC-8  [SO08]  26.38,89.64 180 top
U10  UHS_INVERTER_SCHMITT_TRIGGER_MPAK2  [SIP6_MICROPAK2]  28.15,83.07 180 top
U11  UHS_INVERTER_SCHMITT_TRIGGER_MPAK2  [SIP6_MICROPAK2]  25.27,83.07 180 top
U12  U-BLOX_ZED-F9R  [UBLOX_ZED_F9R]  41.78,102.73 0 top
U13  DUAL-OPTO_HCPL-073LSOIC-8  [SO08]  91.89,89.64 180 top
U14  UHS_INVERTER_SCHMITT_TRIGGER_MPAK2  [SIP6_MICROPAK2]  93.66,83.07 180 top
U15  UHS_INVERTER_SCHMITT_TRIGGER_MPAK2  [SIP6_MICROPAK2]  90.78,83.07 180 top
U16  U-BLOX_ZED-F9R  [UBLOX_ZED_F9R]  107.29,102.73 0 top
U$1  [##RST##28]  16.51,44.96 0 top
U$2  [##SFBT##30]  17.02,42.29 0 top
U$3  [PPS9]  21.46,11.94 0 top
U$4  [PWR7]  17.02,11.94 0 top
U$5  [GEO11]  30.99,11.68 0 top
U$6  [#RXI2#34]  46.74,13.84 270 bottom
U$7  [#INT#1]  16.38,39.75 0 top
U$8  [#PPS#3]  16.38,37.34 0 top
U$9  [SFE_LOGO_NAME_FLAME_.3@1]  41.15,43.69 0 bottom
U$10  [#TXO2#235]  49.15,14.22 270 bottom
U$11  [#W##2253]  16.13,34.8 0 top
U$12  [#W##2254]  16,32.26 0 top
U$13  [#D##2249]  15.88,29.72 0 top
U$14  [GNSS_DEAD_RECKONING25]  67.18,33.27 90 top
U$15  [#D##2250]  15.88,27.18 0 top
U$16  [ZED#F9R25]  70.1,33.15 90 top
U$17  [BLK22]  37.59,10.92 90 top
U$18  [#GND#20]  39.12,13.59 90 top
U$19  [#GND#20]  39.12,13.59 270 bottom
U$20  [#SPI#4]  21.84,51.94 0 top
U$21  [L1#L26]  36.07,20.83 0 top
U$22  [#I2C#5]  17.91,52.07 0 top
U$23  [RTK13]  26.16,11.94 0 top
U$24  [GRN23]  53.34,10.92 90 top
U$25  [Z20]  40.77,27.56 0 top
U$26  [Y19]  49.91,25.91 0 top
U$27  [X18]  42.04,18.16 0 bottom
U$28  [Z20]  40.51,27.56 0 bottom
U$29  [Y19]  49.66,25.91 0 bottom
U$30  [SFE_LOGO_NAME_FLAME_.3@1]  106.66,43.69 0 bottom
U$31  [DEAD#RECKONING#GPS#BOARD#SILK#FINAL#JPG]  68.07,51.44 90 top
U$32  [##RST##27]  16.51,44.96 0 bottom
U$33  [##SFBT##29]  17.02,42.29 0 bottom
U$34  [#INT#0]  16.38,39.75 0 bottom
U$35  [#PPS#2]  16.26,37.34 0 bottom
U$36  [DEAD#RECKONING#GPS#BOARD#SILK#FINAL#JPG]  40.77,35.56 0 bottom
U$37  [#W##2251]  16.13,34.8 0 bottom
U$38  [#W##2252]  16,32.26 0 bottom
U$39  [#D##2247]  15.88,29.72 0 bottom
U$40  [#D##2248]  15.88,27.18 0 bottom
U$41  [ANTENNA6]  35.94,19.69 0 top
U$42  [#TXO2#236]  49.15,14.22 90 top
U$43  [#RXI2#35]  46.74,13.84 90 top
U$44  [#SHLD#2258]  57.78,12.32 0 bottom
U$45  [X18]  42.29,18.16 0 top
U$46  [DEAD#RECKONING#GPS#BOARD#SILK#FINAL#JPG]  133.58,51.44 90 top
U$47  [DEAD#RECKONING#GPS#BOARD#SILK#FINAL#JPG]  106.28,35.56 0 bottom
U$48  [##RST##28]  82.02,44.96 0 top
U$49  [##SFBT##30]  82.53,42.29 0 top
U$50  [#INT#1]  81.89,39.75 0 top
U$51  [#PPS#3]  81.89,37.34 0 top
U$52  [#W##2253]  81.64,34.8 0 top
U$53  [#W##2254]  81.51,32.26 0 top
U$54  [#D##2249]  81.38,29.72 0 top
U$55  [#D##2250]  81.38,27.18 0 top
U$56  [#SPI#4]  87.35,51.94 0 top
U$57  [#I2C#5]  83.42,52.07 0 top
U$58  [PWR7]  82.53,11.94 0 top
U$59  [PPS9]  86.97,11.94 0 top
U$60  [RTK13]  91.67,11.94 0 top
U$61  [GEO11]  96.5,11.68 0 top
U$62  [BLK22]  103.1,10.92 90 top
U$63  [GRN23]  118.85,10.92 90 top
U$64  [#GND#20]  104.63,13.59 90 top
U$65  [#GND#20]  104.63,13.59 270 bottom
U$66  [#RXI2#34]  112.25,13.84 270 bottom
U$67  [#TXO2#235]  114.66,14.22 270 bottom
U$68  [ZED#F9R25]  135.61,33.15 90 top
U$69  [##RST##27]  82.02,44.96 0 bottom
U$70  [##SFBT##29]  82.53,42.29 0 bottom
U$71  [#INT#0]  81.89,39.75 0 bottom
U$72  [#PPS#2]  81.77,37.34 0 bottom
U$73  [#W##2251]  81.64,34.8 0 bottom
U$74  [#W##2252]  81.51,32.26 0 bottom
U$75  [#D##2247]  81.38,29.72 0 bottom
U$76  [#D##2248]  81.38,27.18 0 bottom
U$77  [GNSS_DEAD_RECKONING25]  132.69,33.27 90 top
U$78  [L1#L26]  101.58,20.83 0 top
U$79  [ANTENNA6]  101.45,19.69 0 top
U$80  [#TXO2#236]  114.66,14.22 90 top
U$81  [#RXI2#35]  112.25,13.84 90 top
U$82  [#SHLD#2258]  123.29,12.32 0 bottom
U$83  [X18]  107.8,18.16 0 top
U$84  [X18]  107.55,18.16 0 bottom
U$85  [Z20]  106.28,27.56 0 top
U$86  [Z20]  106.02,27.56 0 bottom
U$87  [Y19]  115.42,25.91 0 top
U$88  [Y19]  115.17,25.91 0 bottom
U$89  [SFE_LOGO_NAME_FLAME_.3@1]  41.15,104 0 bottom
U$90  [DEAD#RECKONING#GPS#BOARD#SILK#FINAL#JPG]  68.07,111.74 90 top
U$91  [DEAD#RECKONING#GPS#BOARD#SILK#FINAL#JPG]  40.77,95.87 0 bottom
U$92  [##RST##28]  16.51,105.27 0 top
U$93  [##SFBT##30]  17.02,102.6 0 top
U$94  [#INT#1]  16.38,100.06 0 top
U$95  [#PPS#3]  16.38,97.65 0 top
U$96  [#W##2253]  16.13,95.11 0 top
U$97  [#W##2254]  16,92.57 0 top
U$98  [#D##2249]  15.88,90.03 0 top
U$99  [#D##2250]  15.88,87.49 0 top
U$100  [#SPI#4]  21.84,112.25 0 top
U$101  [#I2C#5]  17.91,112.38 0 top
U$102  [PWR7]  17.02,72.25 0 top
U$103  [PPS9]  21.46,72.25 0 top
U$104  [RTK13]  26.16,72.25 0 top
U$105  [GEO11]  30.99,71.99 0 top
U$106  [BLK22]  37.59,71.23 90 top
U$107  [GRN23]  53.34,71.23 90 top
U$108  [#GND#20]  39.12,73.9 90 top
U$109  [#GND#20]  39.12,73.9 270 bottom
U$110  [#RXI2#34]  46.74,74.15 270 bottom
U$111  [#TXO2#235]  49.15,74.53 270 bottom
U$112  [ZED#F9R25]  70.1,93.46 90 top
U$113  [##RST##27]  16.51,105.27 0 bottom
U$114  [##SFBT##29]  17.02,102.6 0 bottom
U$115  [#INT#0]  16.38,100.06 0 bottom
U$116  [#PPS#2]  16.26,97.65 0 bottom
U$117  [#W##2251]  16.13,95.11 0 bottom
U$118  [#W##2252]  16,92.57 0 bottom
U$119  [#D##2247]  15.88,90.03 0 bottom
U$120  [#D##2248]  15.88,87.49 0 bottom
U$121  [GNSS_DEAD_RECKONING25]  67.18,93.58 90 top
U$122  [L1#L26]  36.07,81.14 0 top
U$123  [ANTENNA6]  35.94,79.99 0 top
U$124  [#TXO2#236]  49.15,74.53 90 top
U$125  [#RXI2#35]  46.74,74.15 90 top
U$126  [#SHLD#2258]  57.78,72.63 0 bottom
U$127  [X18]  42.29,78.47 0 top
U$128  [X18]  42.04,78.47 0 bottom
U$129  [Z20]  40.77,87.87 0 top
U$130  [Z20]  40.51,87.87 0 bottom
U$131  [Y19]  49.91,86.22 0 top
U$132  [Y19]  49.66,86.22 0 bottom
U$133  [SFE_LOGO_NAME_FLAME_.3@1]  106.66,104 0 bottom
U$134  [DEAD#RECKONING#GPS#BOARD#SILK#FINAL#JPG]  133.58,111.74 90 top
U$135  [DEAD#RECKONING#GPS#BOARD#SILK#FINAL#JPG]  106.28,95.87 0 bottom
U$136  [##RST##28]  82.02,105.27 0 top
U$137  [##SFBT##30]  82.53,102.6 0 top
U$138  [#INT#1]  81.89,100.06 0 top
U$139  [#PPS#3]  81.89,97.65 0 top
U$140  [#W##2253]  81.64,95.11 0 top
U$141  [#W##2254]  81.51,92.57 0 top
U$142  [#D##2249]  81.38,90.03 0 top
U$143  [#D##2250]  81.38,87.49 0 top
U$144  [#SPI#4]  87.35,112.25 0 top
U$145  [#I2C#5]  83.42,112.38 0 top
U$146  [PWR7]  82.53,72.25 0 top
U$147  [PPS9]  86.97,72.25 0 top
U$148  [RTK13]  91.67,72.25 0 top
U$149  [GEO11]  96.5,71.99 0 top
U$150  [BLK22]  103.1,71.23 90 top
U$151  [GRN23]  118.85,71.23 90 top
U$152  [#GND#20]  104.63,73.9 90 top
U$153  [#GND#20]  104.63,73.9 270 bottom
U$154  [#RXI2#34]  112.25,74.15 270 bottom
U$155  [#TXO2#235]  114.66,74.53 270 bottom
U$156  [ZED#F9R25]  135.61,93.46 90 top
U$157  [##RST##27]  82.02,105.27 0 bottom
U$158  [##SFBT##29]  82.53,102.6 0 bottom
U$159  [#INT#0]  81.89,100.06 0 bottom
U$160  [#PPS#2]  81.77,97.65 0 bottom
U$161  [#W##2251]  81.64,95.11 0 bottom
U$162  [#W##2252]  81.51,92.57 0 bottom
U$163  [#D##2247]  81.38,90.03 0 bottom
U$164  [#D##2248]  81.38,87.49 0 bottom
U$165  [GNSS_DEAD_RECKONING25]  132.69,93.58 90 top
U$166  [L1#L26]  101.58,81.14 0 top
U$167  [ANTENNA6]  101.45,79.99 0 top
U$168  [#TXO2#236]  114.66,74.53 90 top
U$169  [#RXI2#35]  112.25,74.15 90 top
U$170  [#SHLD#2258]  123.29,72.63 0 bottom
U$171  [X18]  107.8,78.47 0 top
U$172  [X18]  107.55,78.47 0 bottom
U$173  [Z20]  106.28,87.87 0 top
U$174  [Z20]  106.02,87.87 0 bottom
U$175  [Y19]  115.42,86.22 0 top
U$176  [Y19]  115.17,86.22 0 bottom

## Library data of the parts
BT1-BT4 = SparkFun-Batteries; PROD_ID: BAT-16685
C1 C2 C10 C12 C18 C20 C22 C28 C30 C32 C38 C40 = SparkFun-Capacitors; PROD_ID: CAP-12417
C3 C11 C21 C31 = SparkFun-Capacitors; PROD_ID: CAP-15063
C4 C7 C8 C15-C17 C25-C27 C35-C37 = SparkFun-Capacitors; PROD_ID: CAP-15083
C5 C6 C13 C14 C23 C24 C33 C34 = SparkFun-Capacitors; PROD_ID: CAP-15061
C9 C19 C29 C39 = SparkFun-Capacitors; PROD_ID: CAP-14232
D1 D10 D18 D26 = SparkFun-LED; PROD_ID: DIO-00819
D2-D4 D12-D14 D20-D22 D28-D30 = SparkFun-LED; PROD_ID: DIO-08575
D5 D9 D17 D25 = SparkFun-DiscreteSemi; PROD_ID: DIO-10955
D6 D11 D19 D27 = SparkFun-IC-Power; PROD_ID: DIO-14084
D7 D8 D15 D16 D23 D24 D31 D32 = SparkFun-DiscreteSemi; PROD_ID: DIO-15071
E$1-E$4 FD1-FD16 LOGO1-LOGO12 U$9 U$30 U$89 U$133 = SparkFun-Aesthetics
E$5 E$6 = SparkFun-Retired
FB1-FB4 = SparkFun-Coils; PROD_ID: NDUC-15072
H1-H16 = SparkFun-Hardware
J1 J7 J13 J19 = SparkFun-Connectors; PROD_ID: CONN-09193; SF_ID: WRL-09144
J2 J8 J14 J20 = SparkFun-Connectors; PROD_ID: CONN-14122
J3 J6 J9 J11 J15 J17 J21 J23 TP1-TP28 = SparkFun-Connectors
J4 J12 J18 J24 = SparkFun-Connectors; PROD_ID: CONN-08438
J5 J10 J16 J22 = SparkFun-Connectors; PROD_ID: CONN-13694
JP1-JP24 SHIELD SHIELD1-SHIELD3 = SparkFun-Jumpers
R1 R29 R53 R77 = SparkFun-Resistors; PROD_ID: RES-13495
R2 R4 R32 R38 R56 R62 R80 R86 = SparkFun-Resistors; PROD_ID: RES-08270
R3 R5-R7 R45-R48 R69-R72 R93-R96 = SparkFun-Resistors; PROD_ID: RES-15081
R8 R10-R13 R25 R26 R30 R31 R37 R49 R50 R54 R55 R61 R73 R74 R78 R79 R85 = SparkFun-Resistors; PROD_ID: RES-08272
R9 R28 R52 R76 = SparkFun-Resistors; PROD_ID: RES-07856
R14 R15 R33 R34 R57 R58 R81 R82 = SparkFun-Resistors; PROD_ID: RES-14340
R16 R19 R20 R27 R39 R41 R51 R63 R65 R75 R87 R89 = SparkFun-Resistors; PROD_ID: RES-07851
R17 R18 R35 R36 R59 R60 R83 R84 = SparkFun-Resistors; PROD_ID: RES-09334
R21 R22 R43 R44 R67 R68 R91 R92 = SparkFun-Resistors; PROD_ID: RES-13860
R23 R24 R40 R42 R64 R66 R88 R90 = SparkFun-Resistors; PROD_ID: RES-07869
U1 U8 U12 U16 = SparkFun-GPS; PROD_ID: IC-14716
U2 U5 U9 U13 = SparkFun-DiscreteSemi; PROD_ID: IC-15070
U3 U4 U6 U7 U10 U11 U14 U15 = SparkFun-IC-Amplifiers; PROD_ID: IC-17000
U$1-U$8 U$10-U$29 U$32-U$35 U$37-U$45 U$48-U$88 U$92-U$132 U$136-U$176 = top
U$31 U$46 U$90 U$134 = Dead#Reckoning#GPS#board#silk#FINALSMALL
U$36 U$47 U$91 U$135 = Dead#Reckoning#GPS#board#silk#FINAL#png

## Nets
3.3V: C1.1 C2.1 C4.1 C7.1 C8.1 C10.1 D1.A D3.A D5.A J5.2 J6.1 J6.1B J6.17 J6.17B JP6.2 R1.2 R21.2 R22.2 TP5.P$1 U1.P33 U1.P34 U1.P38 U2.8 U3.P6 U4.P6
3.3V1: C12.1 C15.1 C16.1 C17.1 C18.1 C20.1 D9.A D10.A D13.A J9.1 J9.1B J9.17 J9.17B J10.2 JP7.2 R29.2 R43.2 R44.2 TP12.P$1 U5.8 U6.P6 U7.P6 U8.P33 U8.P34 U8.P38
3.3V2: C22.1 C25.1 C26.1 C27.1 C28.1 C30.1 D17.A D18.A D21.A J15.1 J15.1B J15.17 J15.17B J16.2 JP13.2 R53.2 R67.2 R68.2 TP19.P$1 U9.8 U10.P6 U11.P6 U12.P33 U12.P34 U12.P38
3.3V3: C32.1 C35.1 C36.1 C37.1 C38.1 C40.1 D25.A D26.A D29.A J21.1 J21.1B J21.17 J21.17B J22.2 JP19.2 R77.2 R91.2 R92.2 TP26.P$1 U13.8 U14.P6 U15.P6 U16.P33 U16.P34 U16.P38
5V: J6.2 J6.2B J6.4 J6.4B
5V1: J9.2 J9.2B J9.4 J9.4B
5V2: J15.2 J15.2B J15.4 J15.4B
5V3: J21.2 J21.2B J21.4 J21.4B
!RESET: J4.1 R3.P1
!RESET1: J12.1 R45.P1
!RESET2: J18.1 R69.P1
!RESET3: J24.1 R93.P1
!SAFEBOOT: J4.2 R3.P2
!SAFEBOOT1: J12.2 R45.P2
!SAFEBOOT2: J18.2 R69.P2
!SAFEBOOT3: J24.2 R93.P2
CE1: J6.26 J6.26B
CE2: J9.26 J9.26B
CE3: J15.26 J15.26B
CE4: J21.26 J21.26B
D_SEL: JP5.1 U1.P47
D_SEL1: JP8.1 U8.P47
D_SEL2: JP14.1 U12.P47
D_SEL3: JP20.1 U16.P47
DIR+: J4.7 R20.1
DIR+1: J12.7 R41.1
DIR+2: J18.7 R65.1
DIR+3: J24.7 R89.1
DIR_IN: R23.2 U2.4
DIR_IN1: R42.2 U5.4
DIR_IN2: R66.2 U9.4
DIR_IN3: R90.2 U13.4
DIR_OUT: R6.P6 TP7.P$1 U4.P4
DIR_OUT1: R47.P6 TP14.P$1 U7.P4
DIR_OUT2: R71.P6 TP21.P$1 U11.P4
DIR_OUT3: R95.P6 TP28.P$1 U15.P4
DIR_SCHMITT: R22.1 U2.6 U4.P2
DIR_SCHMITT1: R44.1 U5.6 U7.P2
DIR_SCHMITT2: R68.1 U9.6 U11.P2
DIR_SCHMITT3: R92.1 U13.6 U15.P2
DMINUS: R18.2 U1.P39
DMINUS1: R36.2 U8.P39
DMINUS2: R60.2 U12.P39
DMINUS3: R84.2 U16.P39
DPLUS: R17.2 U1.P40
DPLUS1: R35.2 U8.P40
DPLUS2: R59.2 U12.P40
DPLUS3: R83.2 U16.P40
GEOF_STAT: D4.A R7.P7
GEOF_STAT1: D14.A R48.P7
GEOF_STAT2: D22.A R72.P7
GEOF_STAT3: D30.A R96.P7
GND: BT1.- C1.2 C2.2 C3.2 C4.2 C5.2 C6.2 C7.2 C8.2 C9.2 C10.2 D6.2 D7.1 D8.1 J1.1 J1.2 J2.GND J2.GND2 J3.1 J4.6 J4.8 J5.1 J6.6 J6.6B J6.9 J6.9B J6.14 J6.14B J6.20 J6.20B J6.25 J6.25B J6.30 J6.30B J6.34 J6.34B J6.39 J6.39B JP1.1 JP2.1 JP4.1 JP5.2 R1.1 R14.1 R15.1 SHIELD.1 U1.G1 U1.G2 U1.G3 U1.G4 U1.G5 U1.G6 U1.G7 U1.G8 U1.G9 U1.G10 U1.G11 U1.G12 U1.G13 U1.G14 U1.G15 U1.G16 U1.G17 U1.G18 U1.G19 U1.G20 U1.G21 U1.G22 U1.G23 U1.G24 U1.G25 U1.G26 U1.G27 U1.G28 U1.G29 U1.G30 U1.G31 U1.G32 U1.G33 U1.G34 U1.G35 U1.G36 U1.G37 U1.G38 U1.G39 U1.G40 U1.G41 U1.G42 U1.G43 U1.G44 U1.G45 U1.G46 U1.G47 U1.G48 U1.P1 U1.P3 U1.P12 U1.P14 U1.P32 U1.P37 U1.P41 U1.P48 U2.2 U2.3 U2.5 U3.P3 U4.P3
GND1: BT2.- C11.2 C12.2 C13.2 C14.2 C15.2 C16.2 C17.2 C18.2 C19.2 C20.2 D11.2 D15.1 D16.1 J7.1 J7.2 J8.GND J8.GND2 J9.6 J9.6B J9.9 J9.9B J9.14 J9.14B J9.20 J9.20B J9.25 J9.25B J9.30 J9.30B J9.34 J9.34B J9.39 J9.39B J10.1 J11.1 J12.6 J12.8 JP8.2 JP9.1 JP11.1 JP12.1 R29.1 R33.1 R34.1 SHIELD1.1 U5.2 U5.3 U5.5 U6.P3 U7.P3 U8.G1 U8.G2 U8.G3 U8.G4 U8.G5 U8.G6 U8.G7 U8.G8 U8.G9 U8.G10 U8.G11 U8.G12 U8.G13 U8.G14 U8.G15 U8.G16 U8.G17 U8.G18 U8.G19 U8.G20 U8.G21 U8.G22 U8.G23 U8.G24 U8.G25 U8.G26 U8.G27 U8.G28 U8.G29 U8.G30 U8.G31 U8.G32 U8.G33 U8.G34 U8.G35 U8.G36 U8.G37 U8.G38 U8.G39 U8.G40 U8.G41 U8.G42 U8.G43 U8.G44 U8.G45 U8.G46 U8.G47 U8.G48 U8.P1 U8.P3 U8.P12 U8.P14 U8.P32 U8.P37 U8.P41 U8.P48
GND2: BT3.- C21.2 C22.2 C23.2 C24.2 C25.2 C26.2 C27.2 C28.2 C29.2 C30.2 D19.2 D23.1 D24.1 J13.1 J13.2 J14.GND J14.GND2 J15.6 J15.6B J15.9 J15.9B J15.14 J15.14B J15.20 J15.20B J15.25 J15.25B J15.30 J15.30B J15.34 J15.34B J15.39 J15.39B J16.1 J17.1 J18.6 J18.8 JP14.2 JP15.1 JP17.1 JP18.1 R53.1 R57.1 R58.1 SHIELD2.1 U9.2 U9.3 U9.5 U10.P3 U11.P3 U12.G1 U12.G2 U12.G3 U12.G4 U12.G5 U12.G6 U12.G7 U12.G8 U12.G9 U12.G10 U12.G11 U12.G12 U12.G13 U12.G14 U12.G15 U12.G16 U12.G17 U12.G18 U12.G19 U12.G20 U12.G21 U12.G22 U12.G23 U12.G24 U12.G25 U12.G26 U12.G27 U12.G28 U12.G29 U12.G30 U12.G31 U12.G32 U12.G33 U12.G34 U12.G35 U12.G36 U12.G37 U12.G38 U12.G39 U12.G40 U12.G41 U12.G42 U12.G43 U12.G44 U12.G45 U12.G46 U12.G47 U12.G48 U12.P1 U12.P3 U12.P12 U12.P14 U12.P32 U12.P37 U12.P41 U12.P48
GND3: BT4.- C31.2 C32.2 C33.2 C34.2 C35.2 C36.2 C37.2 C38.2 C39.2 C40.2 D27.2 D31.1 D32.1 J19.1 J19.2 J20.GND J20.GND2 J21.6 J21.6B J21.9 J21.9B J21.14 J21.14B J21.20 J21.20B J21.25 J21.25B J21.30 J21.30B J21.34 J21.34B J21.39 J21.39B J22.1 J23.1 J24.6 J24.8 JP20.2 JP21.1 JP23.1 JP24.1 R77.1 R81.1 R82.1 SHIELD3.1 U13.2 U13.3 U13.5 U14.P3 U15.P3 U16.G1 U16.G2 U16.G3 U16.G4 U16.G5 U16.G6 U16.G7 U16.G8 U16.G9 U16.G10 U16.G11 U16.G12 U16.G13 U16.G14 U16.G15 U16.G16 U16.G17 U16.G18 U16.G19 U16.G20 U16.G21 U16.G22 U16.G23 U16.G24 U16.G25 U16.G26 U16.G27 U16.G28 U16.G29 U16.G30 U16.G31 U16.G32 U16.G33 U16.G34 U16.G35 U16.G36 U16.G37 U16.G38 U16.G39 U16.G40 U16.G41 U16.G42 U16.G43 U16.G44 U16.G45 U16.G46 U16.G47 U16.G48 U16.P1 U16.P3 U16.P12 U16.P14 U16.P32 U16.P37 U16.P41 U16.P48
GP1: J9.31 J9.31B
GP2: J9.32 J9.32B
GP3: J9.33 J9.33B
GP4: J6.7 J6.7B
GP5: J9.36 J9.36B
GP6: J6.31 J6.31B
GP7: J9.35 J9.35B
GP8: J9.38 J9.38B
GP9: J9.40 J9.40B
GP10: J9.37 J9.37B
GP11: J9.7 J9.7B
GP12: J6.32 J6.32B
GP13: J6.33 J6.33B
GP14: J9.11 J9.11B
GP15: J9.12 J9.12B
GP16: J6.36 J6.36B
GP17: J6.11 J6.11B
GP18: J6.12 J6.12B
GP19: J6.35 J6.35B
GP20: J6.38 J6.38B
GP21: J6.40 J6.40B
GP22: J6.15 J6.15B
GP23: J6.16 J6.16B
GP24: J6.18 J6.18B
GP25: J6.22 J6.22B
GP26: J6.37 J6.37B
GP27: J6.13 J6.13B
GP28: J9.15 J9.15B
GP29: J9.16 J9.16B
GP30: J9.18 J9.18B
GP31: J9.22 J9.22B
GP32: J9.13 J9.13B
GP33: J15.31 J15.31B
GP34: J15.32 J15.32B
GP35: J15.33 J15.33B
GP36: J15.36 J15.36B
GP37: J15.35 J15.35B
GP38: J15.38 J15.38B
GP39: J15.40 J15.40B
GP40: J15.37 J15.37B
GP41: J15.7 J15.7B
GP42: J15.11 J15.11B
GP43: J15.12 J15.12B
GP44: J15.15 J15.15B
GP45: J15.16 J15.16B
GP46: J15.18 J15.18B
GP47: J15.22 J15.22B
GP48: J15.13 J15.13B
GP49: J21.31 J21.31B
GP50: J21.32 J21.32B
GP51: J21.33 J21.33B
GP52: J21.36 J21.36B
GP53: J21.35 J21.35B
GP54: J21.38 J21.38B
GP55: J21.40 J21.40B
GP56: J21.37 J21.37B
GP57: J21.7 J21.7B
GP58: J21.11 J21.11B
GP59: J21.12 J21.12B
GP60: J21.15 J21.15B
GP61: J21.16 J21.16B
GP62: J21.18 J21.18B
GP63: J21.22 J21.22B
GP64: J21.13 J21.13B
ID_SC: J6.28 J6.28B
ID_SC1: J9.28 J9.28B
ID_SC2: J15.28 J15.28B
ID_SC3: J21.28 J21.28B
ID_SD: J6.27 J6.27B
ID_SD1: J9.27 J9.27B
ID_SD2: J15.27 J15.27B
ID_SD3: J21.27 J21.27B
INT: J4.3 R3.P3
INT1: J12.3 R45.P3
INT2: J18.3 R69.P3
INT3: J24.3 R93.P3
N$1: JP6.1 R13.2
N$2: D5.C R16.2
N$3: JP6.3 R8.2
N$4: D1.C R9.2
N$5: C3.1 FB1.P2 R2.1
N$6: D6.6 R18.1
N$7: D6.4 R17.1
N$8: JP1.2 R9.1
N$9: D6.3 J2.A6 J2.B6
N$10: D6.5 J2.VBUS1 J2.VBUS2
N$11: D6.1 J2.A7 J2.B7
N$12: J2.B5 R14.2
N$13: R3.P8 U1.P49
N$14: R3.P6 U1.P51
N$15: R5.P6 U1.P44
N$16: JP4.2 R12.1
N$17: D4.C R12.2
N$18: J2.A5 R15.2
N$19: R5.P5 U1.P45
N$20: R4.1 U1.P46
N$21: R5.P8 U1.P42
N$22: JP3.2 R11.1
N$23: JP2.2 R10.1
N$24: D2.C R10.2
N$25: D3.C R11.2
N$26: R5.P7 U1.P43
N$27: C6.1 D8.3 R19.2 R24.1
N$28: R7.P2 U1.P19
N$29: R7.P1 U1.P20
N$30: R3.P5 U1.P53
N$31: R3.P7 U1.P50
N$32: R6.P1 U1.P27
N$33: R6.P2 U1.P26
N$34: R6.P4 U1.P22
N$35: R6.P3 U1.P23
N$36: C5.1 D7.3 R20.2 R23.1
N$37: D9.C R27.2
N$38: JP7.1 R25.2
N$39: JP7.3 R26.2
N$40: JP10.2 R31.1
N$41: JP11.2 R30.1
N$42: D12.C R30.2
N$43: D13.C R31.2
N$44: D10.C R28.2
N$45: JP9.2 R28.1
N$46: C11.1 FB2.P2 R32.1
N$47: J8.B5 R33.2
N$48: J8.A5 R34.2
N$49: D11.5 J8.VBUS1 J8.VBUS2
N$50: D11.3 J8.A6 J8.B6
N$51: D11.1 J8.A7 J8.B7
N$52: D11.6 R36.1
N$53: D11.4 R35.1
N$54: JP12.2 R37.1
N$55: D14.C R37.2
N$56: R45.P8 U8.P49
N$57: R45.P6 U8.P51
N$58: R46.P6 U8.P44
N$59: R46.P5 U8.P45
N$60: R38.1 U8.P46
N$61: R46.P8 U8.P42
N$62: R46.P7 U8.P43
N$63: R48.P2 U8.P19
N$64: R48.P1 U8.P20
N$65: R45.P5 U8.P53
N$66: R45.P7 U8.P50
N$67: R47.P1 U8.P27
N$68: R47.P2 U8.P26
N$69: R47.P4 U8.P22
N$70: R47.P3 U8.P23
N$71: C14.1 D15.3 R39.2 R40.1
N$72: C13.1 D16.3 R41.2 R42.1
N$73: D17.C R51.2
N$74: JP13.1 R49.2
N$75: JP13.3 R50.2
N$76: JP16.2 R55.1
N$77: JP17.2 R54.1
N$78: D20.C R54.2
N$79: D21.C R55.2
N$80: D18.C R52.2
N$81: JP15.2 R52.1
N$82: C21.1 FB3.P2 R56.1
N$83: J14.B5 R57.2
N$84: J14.A5 R58.2
N$85: D19.5 J14.VBUS1 J14.VBUS2
N$86: D19.3 J14.A6 J14.B6
N$87: D19.1 J14.A7 J14.B7
N$88: D19.6 R60.1
N$89: D19.4 R59.1
N$90: JP18.2 R61.1
N$91: D22.C R61.2
N$92: R69.P8 U12.P49
N$93: R69.P6 U12.P51
N$94: R70.P6 U12.P44
N$95: R70.P5 U12.P45
N$96: R62.1 U12.P46
N$97: R70.P8 U12.P42
N$98: R70.P7 U12.P43
N$99: R72.P2 U12.P19
N$100: R72.P1 U12.P20
N$101: R69.P5 U12.P53
N$102: R69.P7 U12.P50
N$103: R71.P1 U12.P27
N$104: R71.P2 U12.P26
N$105: R71.P4 U12.P22
N$106: R71.P3 U12.P23
N$107: C24.1 D23.3 R63.2 R64.1
N$108: C23.1 D24.3 R65.2 R66.1
N$109: D25.C R75.2
N$110: JP19.1 R73.2
N$111: JP19.3 R74.2
N$112: JP22.2 R79.1
N$113: JP23.2 R78.1
N$114: D28.C R78.2
N$115: D29.C R79.2
N$116: D26.C R76.2
N$117: JP21.2 R76.1
N$118: C31.1 FB4.P2 R80.1
N$119: J20.B5 R81.2
N$120: J20.A5 R82.2
N$121: D27.5 J20.VBUS1 J20.VBUS2
N$122: D27.3 J20.A6 J20.B6
N$123: D27.1 J20.A7 J20.B7
N$124: D27.6 R84.1
N$125: D27.4 R83.1
N$126: JP24.2 R85.1
N$127: D30.C R85.2
N$128: R93.P8 U16.P49
N$129: R93.P6 U16.P51
N$130: R94.P6 U16.P44
N$131: R94.P5 U16.P45
N$132: R86.1 U16.P46
N$133: R94.P8 U16.P42
N$134: R94.P7 U16.P43
N$135: R96.P2 U16.P19
N$136: R96.P1 U16.P20
N$137: R93.P5 U16.P53
N$138: R93.P7 U16.P50
N$139: R95.P1 U16.P27
N$140: R95.P2 U16.P26
N$141: R95.P4 U16.P22
N$142: R95.P3 U16.P23
N$143: C34.1 D31.3 R87.2 R88.1
N$144: C33.1 D32.3 R89.2 R90.1
PPS: D2.A J4.4 R3.P4
PPS1: D12.A J12.4 R45.P4
PPS2: D20.A J18.4 R69.P4
PPS3: D28.A J24.4 R93.P4
QWIIC_SCL: J5.4 J6.5 J6.5B R8.1
QWIIC_SCL1: J9.5 J9.5B J10.4 R26.1
QWIIC_SCL2: J15.5 J15.5B J16.4 R50.1
QWIIC_SCL3: J21.5 J21.5B J22.4 R74.1
QWIIC_SDA: J5.3 J6.3 J6.3B R13.1
QWIIC_SDA1: J9.3 J9.3B J10.3 R25.1
QWIIC_SDA2: J15.3 J15.3B J16.3 R49.1
QWIIC_SDA3: J21.3 J21.3B J22.3 R73.1
RF_IN [Antenna]: FB1.P1 J1.FEED U1.P2
RF_IN1 [Antenna]: FB2.P1 J7.FEED U8.P2
RF_IN2 [Antenna]: FB3.P1 J13.FEED U12.P2
RF_IN3 [Antenna]: FB4.P1 J19.FEED U16.P2
RTK_STAT: JP3.1 R7.P8
RTK_STAT1: JP10.1 R48.P8
RTK_STAT2: JP16.1 R72.P8
RTK_STAT3: JP22.1 R96.P8
RXI1: J11.4 R47.P7
RXI2: J3.4 R6.P7
RXI3: J17.4 R71.P7
RXI4: J23.4 R95.P7
RXI/CIPO: J6.8 J6.8B J6.19 J6.19B R5.P2 TP1.P$1
RXI/CIPO1: J9.8 J9.8B J9.19 J9.19B R46.P2 TP8.P$1
RXI/CIPO2: J15.8 J15.8B J15.19 J15.19B R70.P2 TP15.P$1
RXI/CIPO3: J21.8 J21.8B J21.19 J21.19B R94.P2 TP22.P$1
SCL/CLK: J6.23 J6.23B R5.P4 TP3.P$1
SCL/CLK1: J9.23 J9.23B R46.P4 TP10.P$1
SCL/CLK2: J15.23 J15.23B R70.P4 TP17.P$1
SCL/CLK3: J21.23 J21.23B R94.P4 TP24.P$1
SDA/!CS: J6.24 J6.24B R5.P3 TP4.P$1
SDA/!CS1: J9.24 J9.24B R46.P3 TP11.P$1
SDA/!CS2: J15.24 J15.24B R70.P3 TP18.P$1
SDA/!CS3: J21.24 J21.24B R94.P3 TP25.P$1
SHIELD: J2.SHLD1 J2.SHLD2 J2.SHLD3 J2.SHLD4 SHIELD.2
SHIELD1: J8.SHLD1 J8.SHLD2 J8.SHLD3 J8.SHLD4 SHIELD1.2
SHIELD2: J14.SHLD1 J14.SHLD2 J14.SHLD3 J14.SHLD4 SHIELD2.2
SHIELD3: J20.SHLD1 J20.SHLD2 J20.SHLD3 J20.SHLD4 SHIELD3.2
TX_READY: J6.29 J6.29B R4.2
TX_READY1: J9.29 J9.29B R38.2
TX_READY2: J15.29 J15.29B R62.2
TX_READY3: J21.29 J21.29B R86.2
TXO1: J11.5 R47.P8
TXO2: J3.5 R6.P8
TXO3: J17.5 R71.P8
TXO4: J23.5 R95.P8
TXO/COPI: J6.10 J6.10B J6.21 J6.21B R5.P1 TP2.P$1
TXO/COPI1: J9.10 J9.10B J9.21 J9.21B R46.P1 TP9.P$1
TXO/COPI2: J15.10 J15.10B J15.21 J15.21B R70.P1 TP16.P$1
TXO/COPI3: J21.10 J21.10B J21.21 J21.21B R94.P1 TP23.P$1
V_BATT: BT1.+ C9.1 R16.1 U1.P36
V_BATT1: BT2.+ C19.1 R27.1 U8.P36
V_BATT2: BT3.+ C29.1 R51.1 U12.P36
V_BATT3: BT4.+ C39.1 R75.1 U16.P36
V_RF: R2.2 U1.P7
V_RF1: R32.2 U8.P7
V_RF2: R56.2 U12.P7
V_RF3: R80.2 U16.P7
WT+: J4.5 R19.1
WT+1: J12.5 R39.1
WT+2: J18.5 R63.1
WT+3: J24.5 R87.1
WT_IN: R24.2 U2.1
WT_IN1: R40.2 U5.1
WT_IN2: R64.2 U9.1
WT_IN3: R88.2 U13.1
WT_OUT: R6.P5 TP6.P$1 U3.P4
WT_OUT1: R47.P5 TP13.P$1 U6.P4
WT_OUT2: R71.P5 TP20.P$1 U10.P4
WT_OUT3: R95.P5 TP27.P$1 U14.P4
WT_SCHMITT: R21.1 U2.7 U3.P2
WT_SCHMITT1: R43.1 U5.7 U6.P2
WT_SCHMITT2: R67.1 U9.7 U10.P2
WT_SCHMITT3: R91.1 U13.7 U14.P2

## Tracks (layer width: path | path; a pad name or v marks a point on that pad's centre or on a via)
3.3V  (via drill 0.3, 0.35, 0.38, 0.51)
  Top 0.203: C8.1 25.27,21.11 25.63,21.47 U4.P6 25.72,22.25 v26.67,22.25 | U3.P6 28.57,22.27 | 28.57,22.27 v29.21,22.27 | 28.57,22.27 28.5,22.21 C7.1 | JP6.2 v17.86,51.82
  Top 0.254: D1.A 18.5,14.11 18.5,16.08 v18.5,17.09 18.59,17.2 18.59,17.48 23.46,22.35 v23.46,22.4 23.46,24.24 R22.2 | v15.24,61.47 15.24,59.16 J6.1 | J6.17 35.55,60.71 v35.05,61.21 | 30.33,23.39 30.86,23.92 30.86,25.53 C4.1 U2.8 | 30.33,23.39 v29.21,22.27 | R21.2 30.22,23.39 30.33,23.39 | D3.A 27.08,12.22 26.8,11.94 24.89,11.94 24,12.83 24,19.95 25.16,21.11 C8.1
  Top 0.508: v15.25,53.77 15.25,53.23 14.34,52.32 J5.2 | 43.55,51.05 43.55,51.96 C1.1 43.62,53.92 v43.61,53.92 | 43.55,51.05 43.55,49.82 U1.P33 | v52.93,53.95 52.93,54.13 51.13,55.93 D5.A | J6.17 35.3,58.9 35.3,54.75 34.67,54.12 v34.67,54 | U1.P34 42.37,50.75 42.67,51.05 43.55,51.05 | U1.P38 38.03,49.8 C10.1 38.03,52.98 C2.1 37.96,53.05 v37.96,53.97 | R1.2 46.8,53.91 v46.74,53.97
  Bottom 0.203: v26.67,22.25 29.18,22.25 v29.21,22.27
  Bottom 0.254: 17.86,53.77 v17.86,51.82 17.86,42.4 22.49,37.77 22.49,22.99 18.59,19.1 18.59,17.2 v18.5,17.09 | J6.1B v15.23,61.46 v15.24,61.47 | v35.05,61.21 35.05,59.53 J6.17B | v26.67,22.25 23.61,22.25 v23.46,22.4
  Bottom 0.508: v52.93,53.95 52.91,53.97 v46.74,53.97 43.66,53.97 v43.61,53.92 43.56,53.97 v37.96,53.97 37.93,54 v34.67,54 26.6,54 25.46,52.85 20.88,52.85 19.96,53.77 17.86,53.77 v15.25,53.77 15.23,53.8 15.23,56.39 | 15.23,56.39 J6.1B | 15.23,56.39 TP5.P$1
3.3V1  (via drill 0.3, 0.35, 0.38, 0.51)
  Top 0.203: C17.1 90.78,21.11 91.14,21.47 U7.P6 91.23,22.25 v92.18,22.25 | U6.P6 94.08,22.27 | 94.08,22.27 v94.72,22.27 | 94.08,22.27 94.01,22.21 C16.1 | JP7.2 v83.37,51.82
  Top 0.254: D10.A 84.01,14.11 84.01,16.08 84,16.08 v84,17.09 84.1,17.2 84.1,17.48 88.97,22.35 v88.97,22.4 88.97,24.24 R44.2 | v80.75,61.47 80.75,59.16 J9.1 | J9.17 101.06,60.71 v100.56,61.21 | 95.84,23.39 96.37,23.92 96.37,25.53 C15.1 U5.8 | 95.84,23.39 v94.72,22.27 | R43.2 95.73,23.39 95.84,23.39 | D13.A 92.59,12.22 92.31,11.94 90.4,11.94 89.51,12.83 89.51,19.95 90.67,21.11 C17.1
  Top 0.508: v80.77,53.77 80.77,53.23 79.85,52.32 J10.2 | 109.06,51.05 109.06,51.96 C12.1 109.13,53.92 v109.12,53.92 | 109.06,51.05 109.06,49.82 U8.P33 | v118.44,53.95 118.44,54.13 116.64,55.93 D9.A | J9.17 100.81,58.9 100.81,54.75 100.18,54.12 v100.18,54 | U8.P34 107.88,50.75 108.18,51.05 109.06,51.05 | U8.P38 103.54,49.8 C20.1 103.54,52.98 C18.1 103.47,53.05 v103.47,53.97 | R29.2 112.31,53.91 v112.25,53.97
  Bottom 0.203: v92.18,22.25 94.69,22.25 v94.72,22.27
  Bottom 0.254: 83.37,53.77 v83.37,51.82 83.37,42.4 88,37.77 88,22.99 84.1,19.1 84.1,17.2 v84,17.09 | J9.1B v80.74,61.46 v80.75,61.47 | v100.56,61.21 100.56,59.53 J9.17B | v92.18,22.25 89.12,22.25 v88.97,22.4
  Bottom 0.508: v118.44,53.95 118.42,53.97 v112.25,53.97 109.17,53.97 v109.12,53.92 109.07,53.97 v103.47,53.97 103.44,54 v100.18,54 92.11,54 90.97,52.85 86.39,52.85 85.47,53.77 83.37,53.77 v80.77,53.77 80.74,53.8 80.74,56.39 | 80.74,56.39 J9.1B | 80.74,56.39 TP12.P$1
3.3V2  (via drill 0.3, 0.35, 0.38, 0.51)
  Top 0.203: C27.1 25.27,81.42 25.63,81.78 U11.P6 25.72,82.56 v26.67,82.56 | U10.P6 28.57,82.58 | 28.57,82.58 v29.21,82.58 | 28.57,82.58 28.5,82.52 C26.1 | JP13.2 v17.86,112.13
  Top 0.254: D18.A 18.5,74.42 18.5,76.39 v18.5,77.41 18.59,77.5 18.59,77.8 23.46,82.66 v23.46,82.71 23.46,84.55 R68.2 | v15.24,121.78 15.24,119.47 J15.1 | J15.17 35.55,121.02 v35.05,121.52 | 30.33,83.7 30.86,84.23 30.86,85.84 C25.1 U9.8 | 30.33,83.7 v29.21,82.58 | R67.2 30.22,83.7 30.33,83.7 | D21.A 27.08,72.53 26.8,72.25 24.89,72.25 24,73.14 24,80.26 25.16,81.42 C27.1
  Top 0.508: v15.25,114.08 15.25,113.54 14.34,112.63 J16.2 | 43.55,111.36 43.55,112.27 C22.1 43.62,114.23 v43.61,114.23 | 43.55,111.36 43.55,110.13 U12.P33 | v52.93,114.26 52.93,114.44 51.13,116.24 D17.A | J15.17 35.3,119.21 35.3,115.06 34.67,114.44 v34.67,114.31 | U12.P34 42.37,111.06 42.67,111.36 43.55,111.36 | U12.P38 38.03,110.11 C30.1 38.03,113.3 C28.1 37.96,113.36 v37.96,114.28 | R53.2 46.8,114.22 v46.74,114.28
  Bottom 0.203: v26.67,82.56 29.18,82.56 v29.21,82.58
  Bottom 0.254: 17.86,114.08 v17.86,112.13 17.86,102.71 22.49,98.08 22.49,83.3 18.59,79.41 18.59,77.5 v18.5,77.41 | J15.1B v15.23,121.77 v15.24,121.78 | v35.05,121.52 35.05,119.84 J15.17B | v26.67,82.56 23.61,82.56 v23.46,82.71
  Bottom 0.508: v52.93,114.26 52.91,114.28 v46.74,114.28 43.66,114.28 v43.61,114.23 43.56,114.28 v37.96,114.28 37.93,114.31 v34.67,114.31 26.6,114.31 25.46,113.16 20.88,113.16 19.96,114.08 17.86,114.08 v15.25,114.08 15.23,114.11 15.23,116.7 | 15.23,116.7 J15.1B | 15.23,116.7 TP19.P$1
3.3V3  (via drill 0.3, 0.35, 0.38, 0.51)
  Top 0.203: C37.1 90.78,81.42 91.14,81.78 U15.P6 91.23,82.56 v92.18,82.56 | U14.P6 94.08,82.58 | 94.08,82.58 v94.72,82.58 | 94.08,82.58 94.01,82.52 C36.1 | JP19.2 v83.37,112.13
  Top 0.254: D26.A 84.01,74.42 84.01,76.39 84,76.39 v84,77.41 84.1,77.5 84.1,77.8 88.97,82.66 v88.97,82.71 88.97,84.55 R92.2 | v80.75,121.78 80.75,119.47 J21.1 | J21.17 101.06,121.02 v100.56,121.52 | 95.84,83.7 96.37,84.23 96.37,85.84 C35.1 U13.8 | 95.84,83.7 v94.72,82.58 | R91.2 95.73,83.7 95.84,83.7 | D29.A 92.59,72.53 92.31,72.25 90.4,72.25 89.51,73.14 89.51,80.26 90.67,81.42 C37.1